# Altium PCB DAL_DPU.PcbDoc (part 1 of 3)
Units mm, origin at the board's own origin, x right, y up, seen from the top; angles counter-clockwise.
Board outline 93 x 90 mm, 4 copper layers (L1_TOP, L2_GND, L3_POWER, L4_BOT), stack 1.584 mm thick; 234 components, 146 nets, 788 pads, 889 vias.
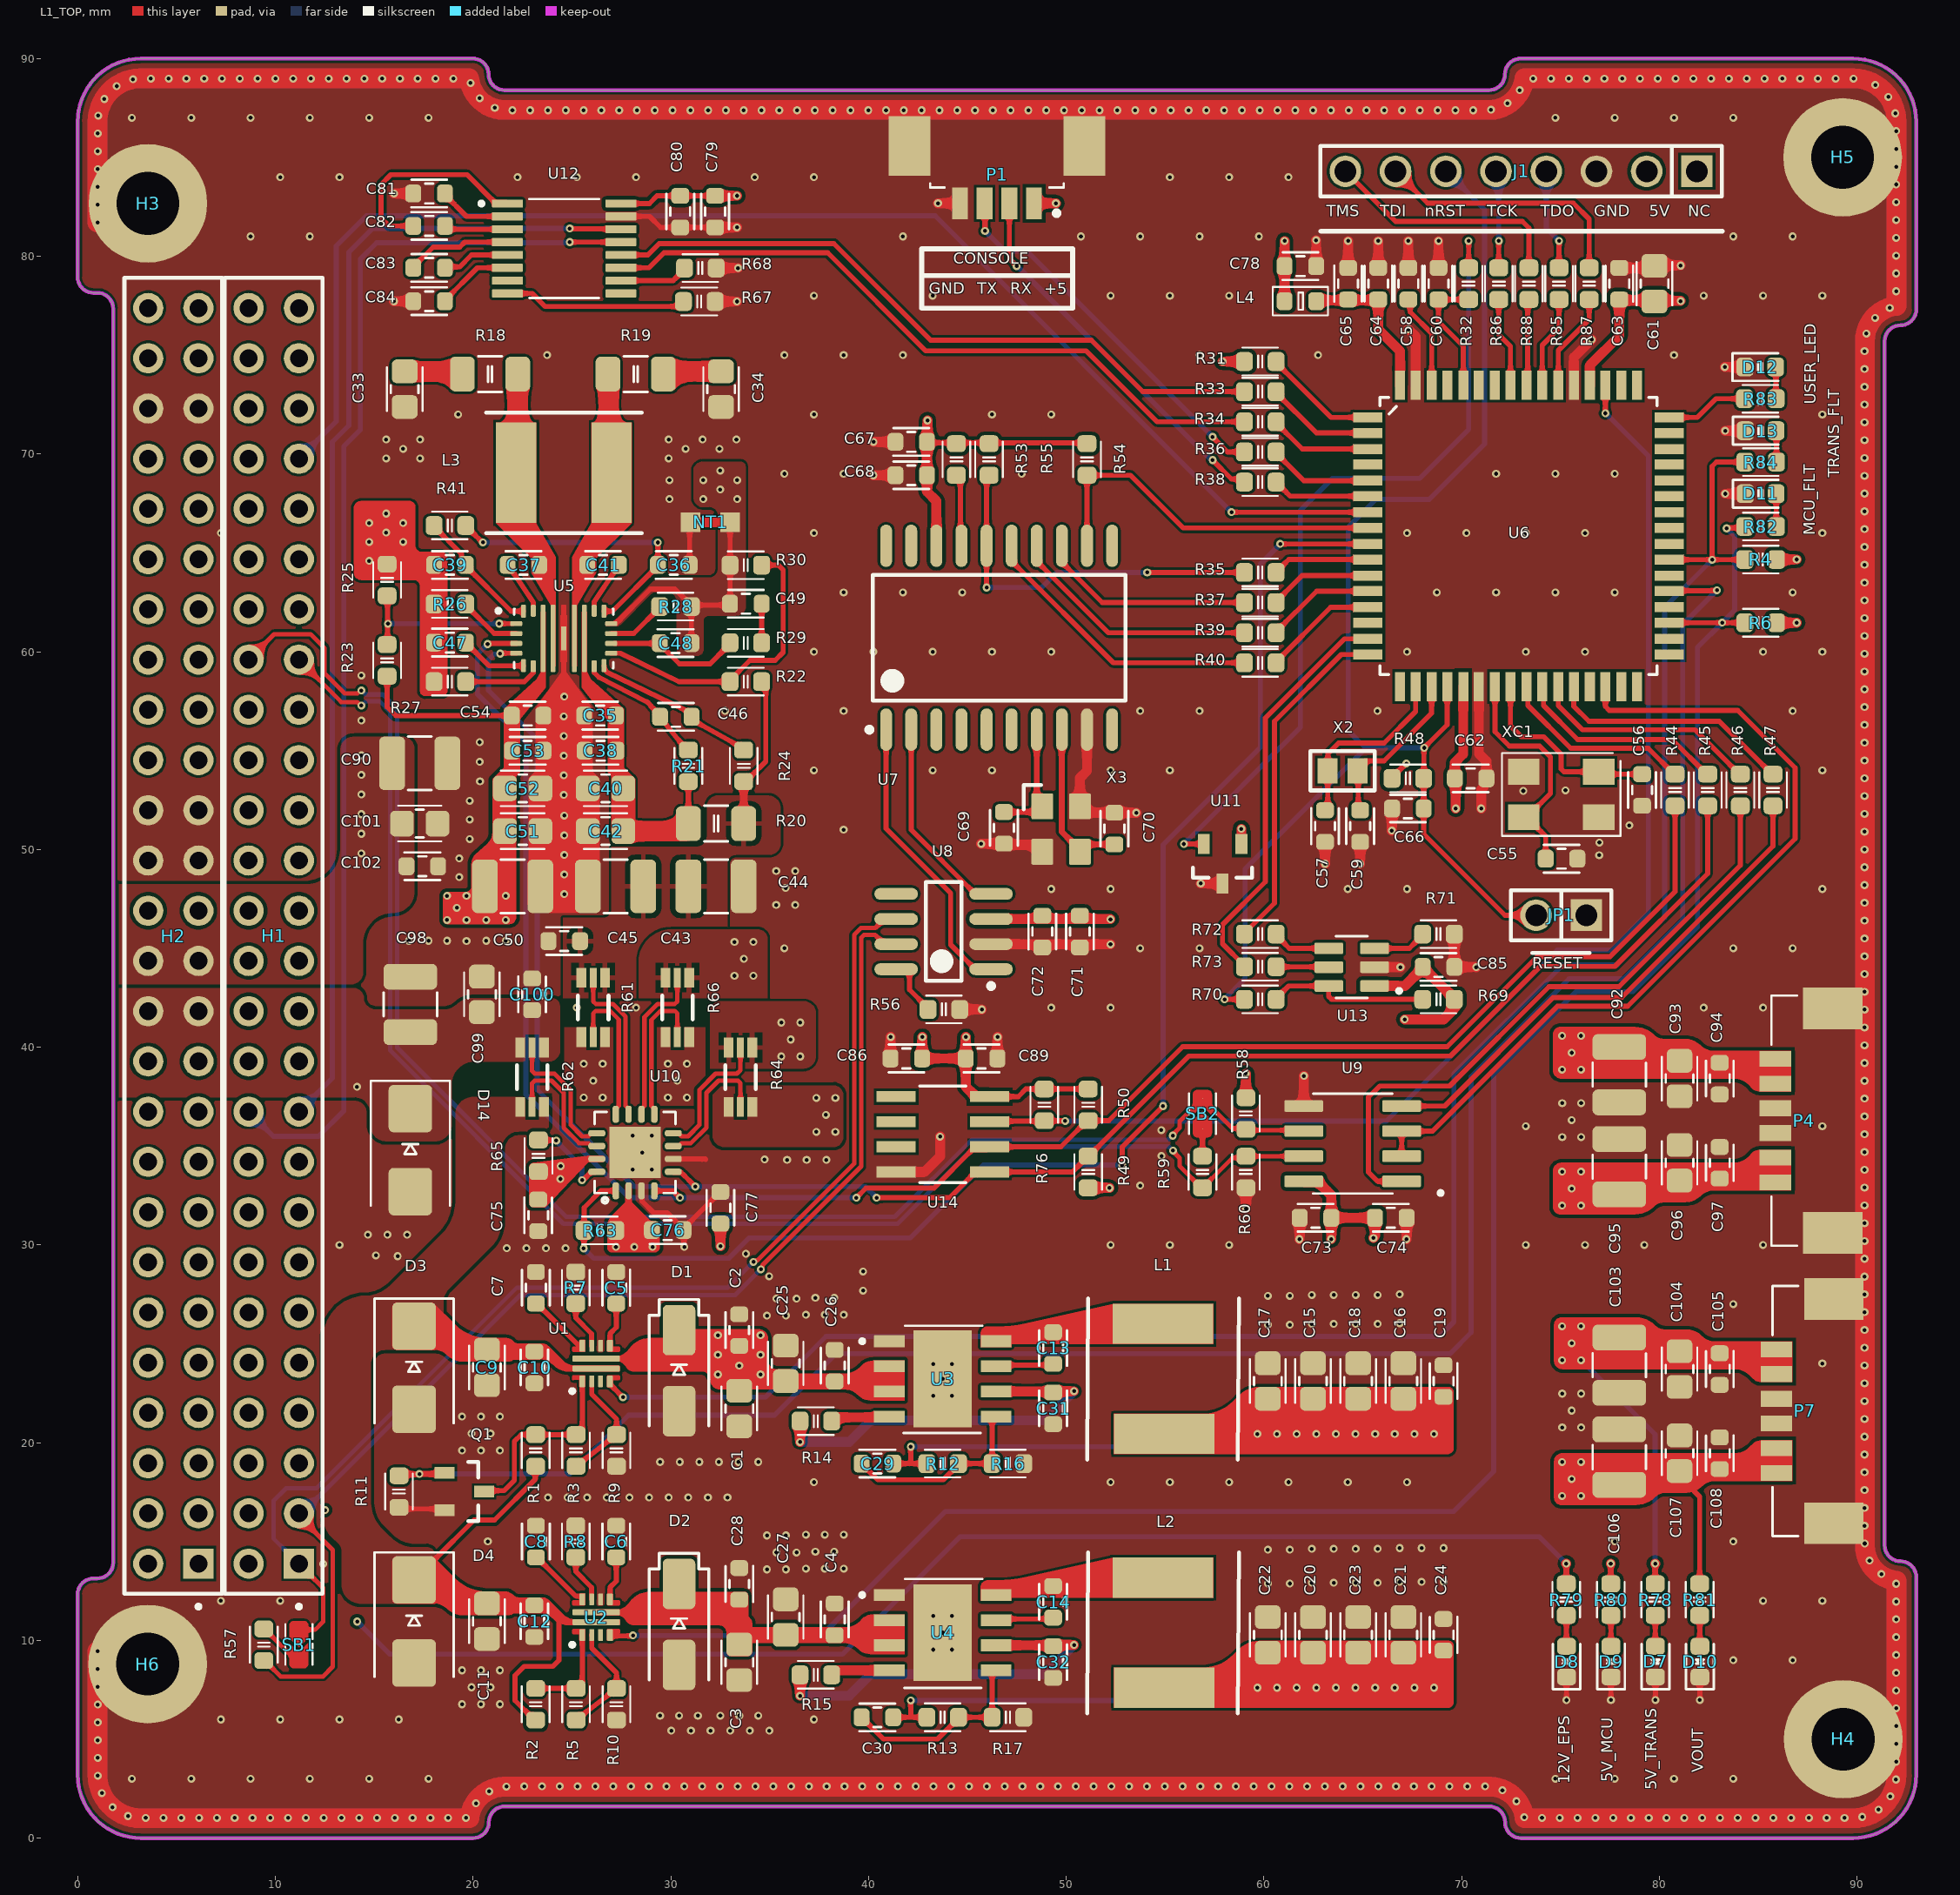
[diagram p0: L1_TOP view]
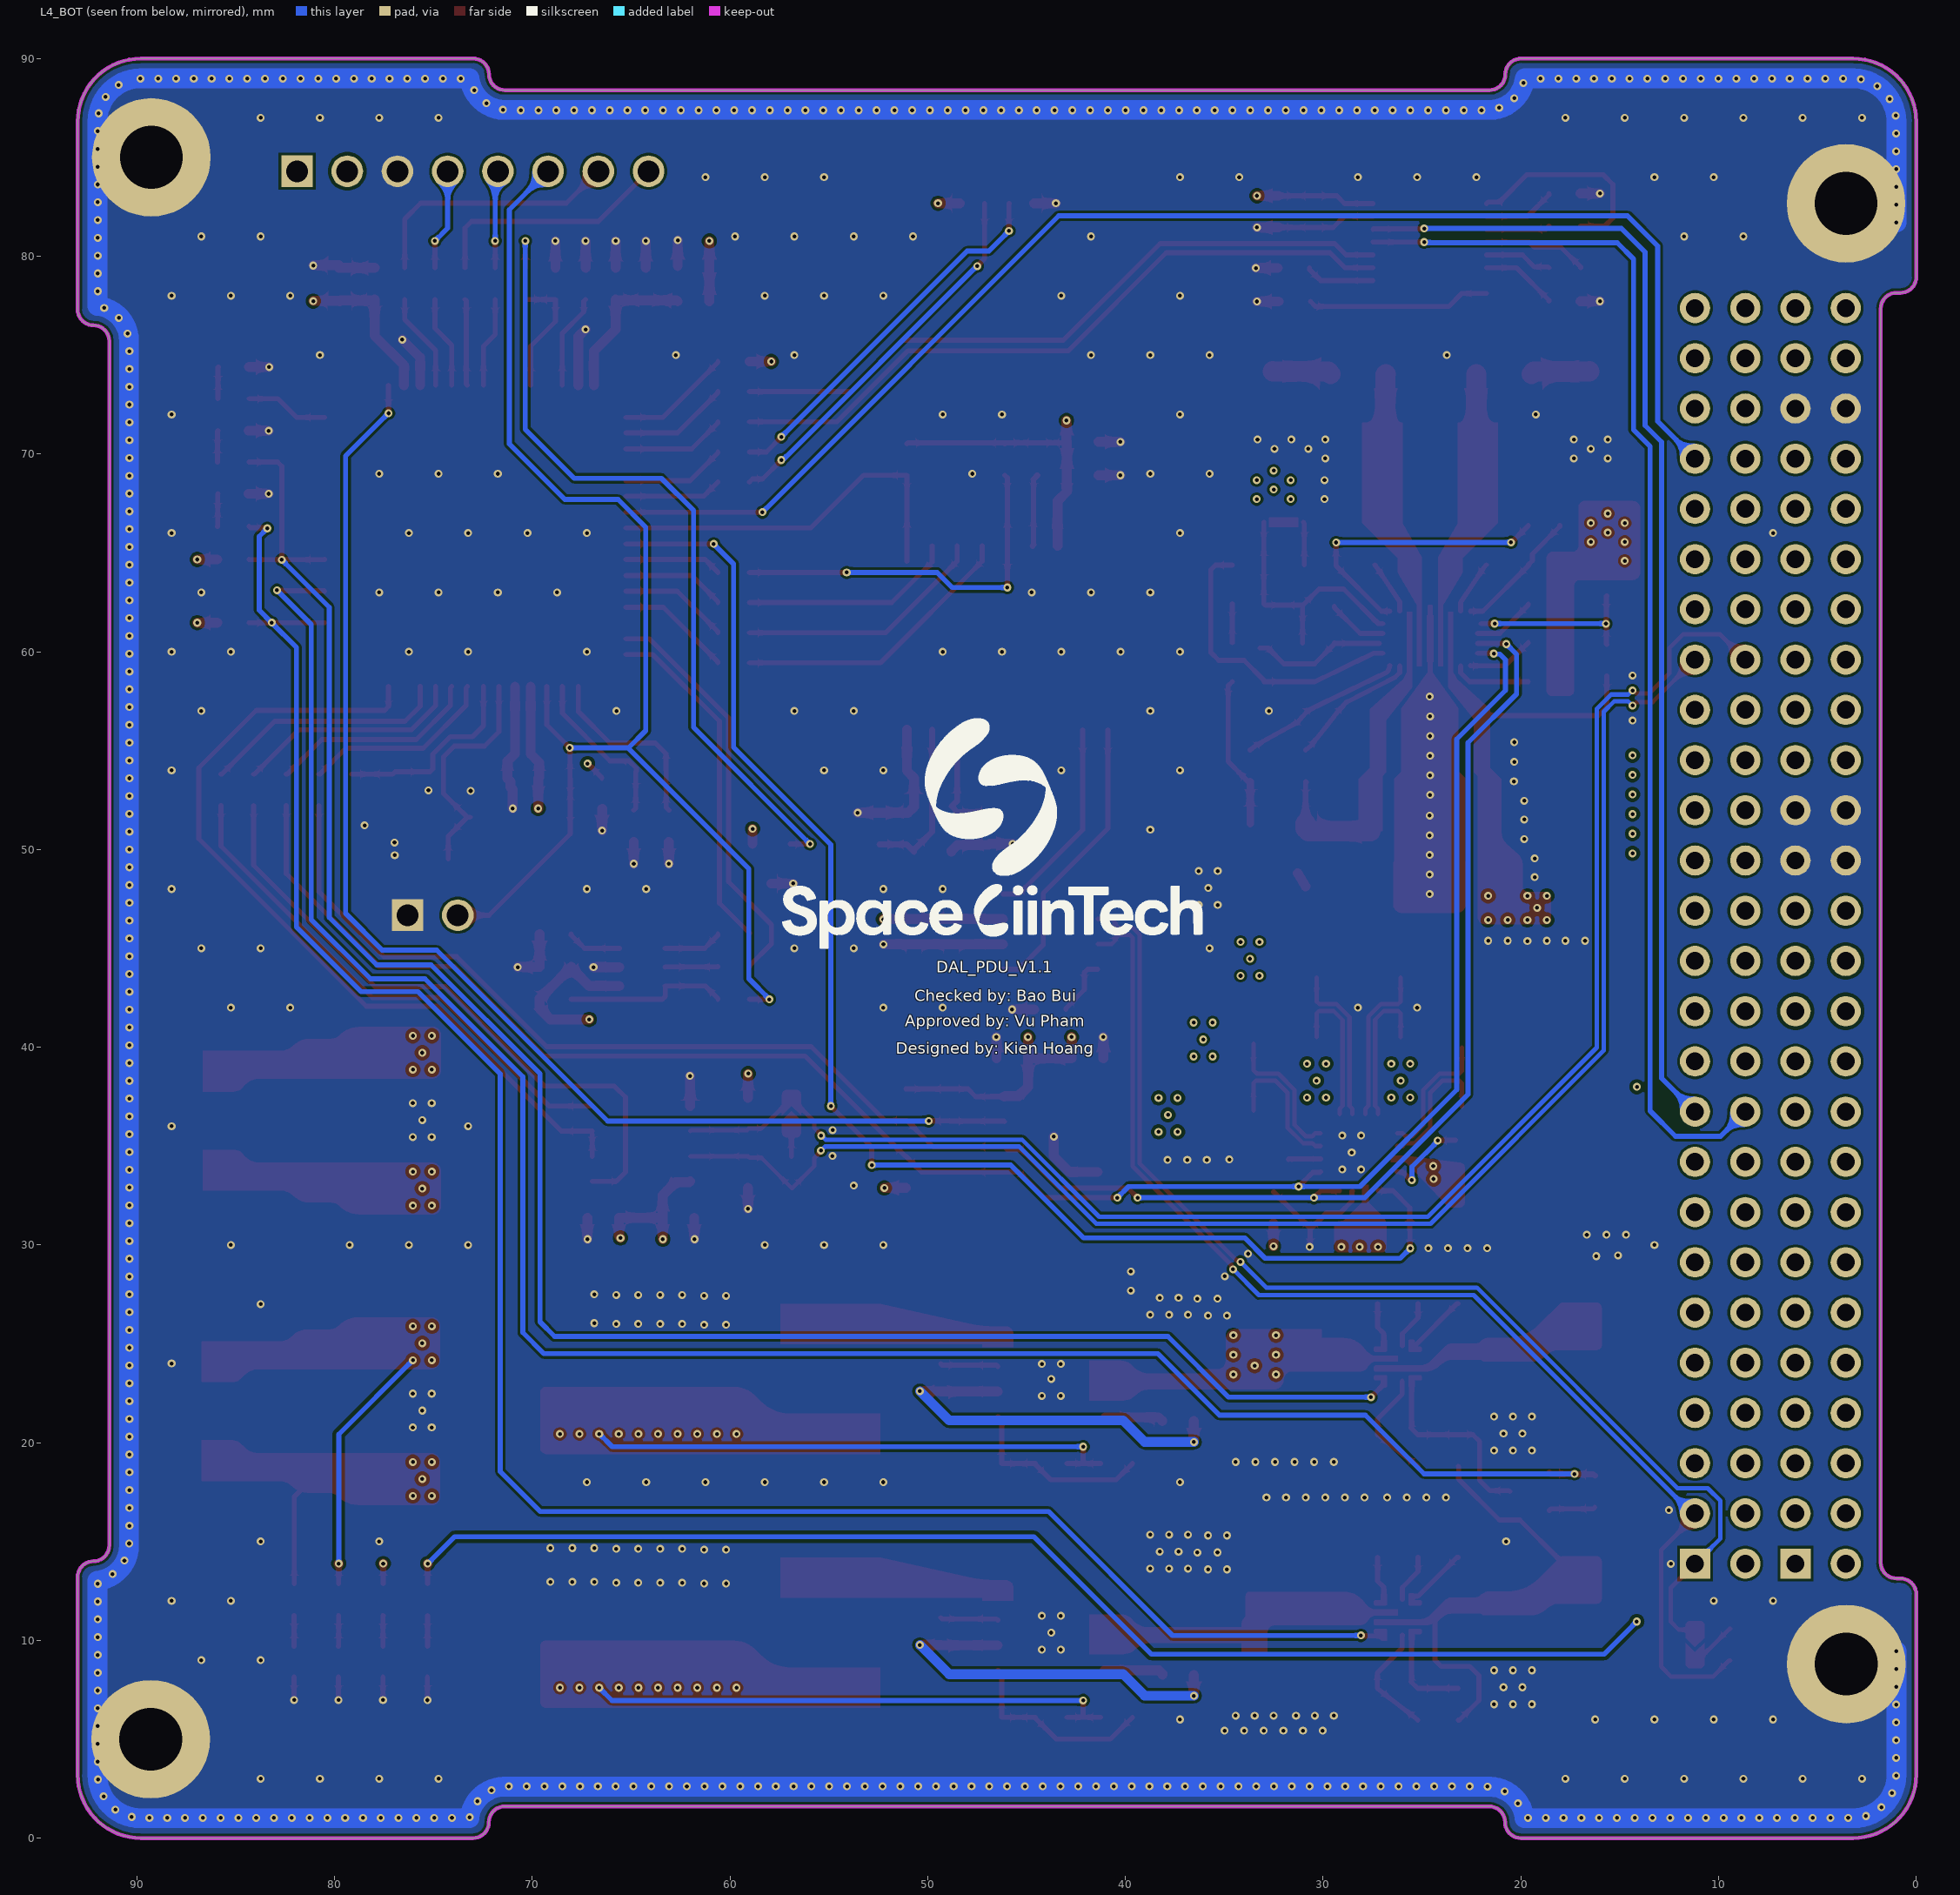
[diagram p1: L4_BOT view, seen from below]
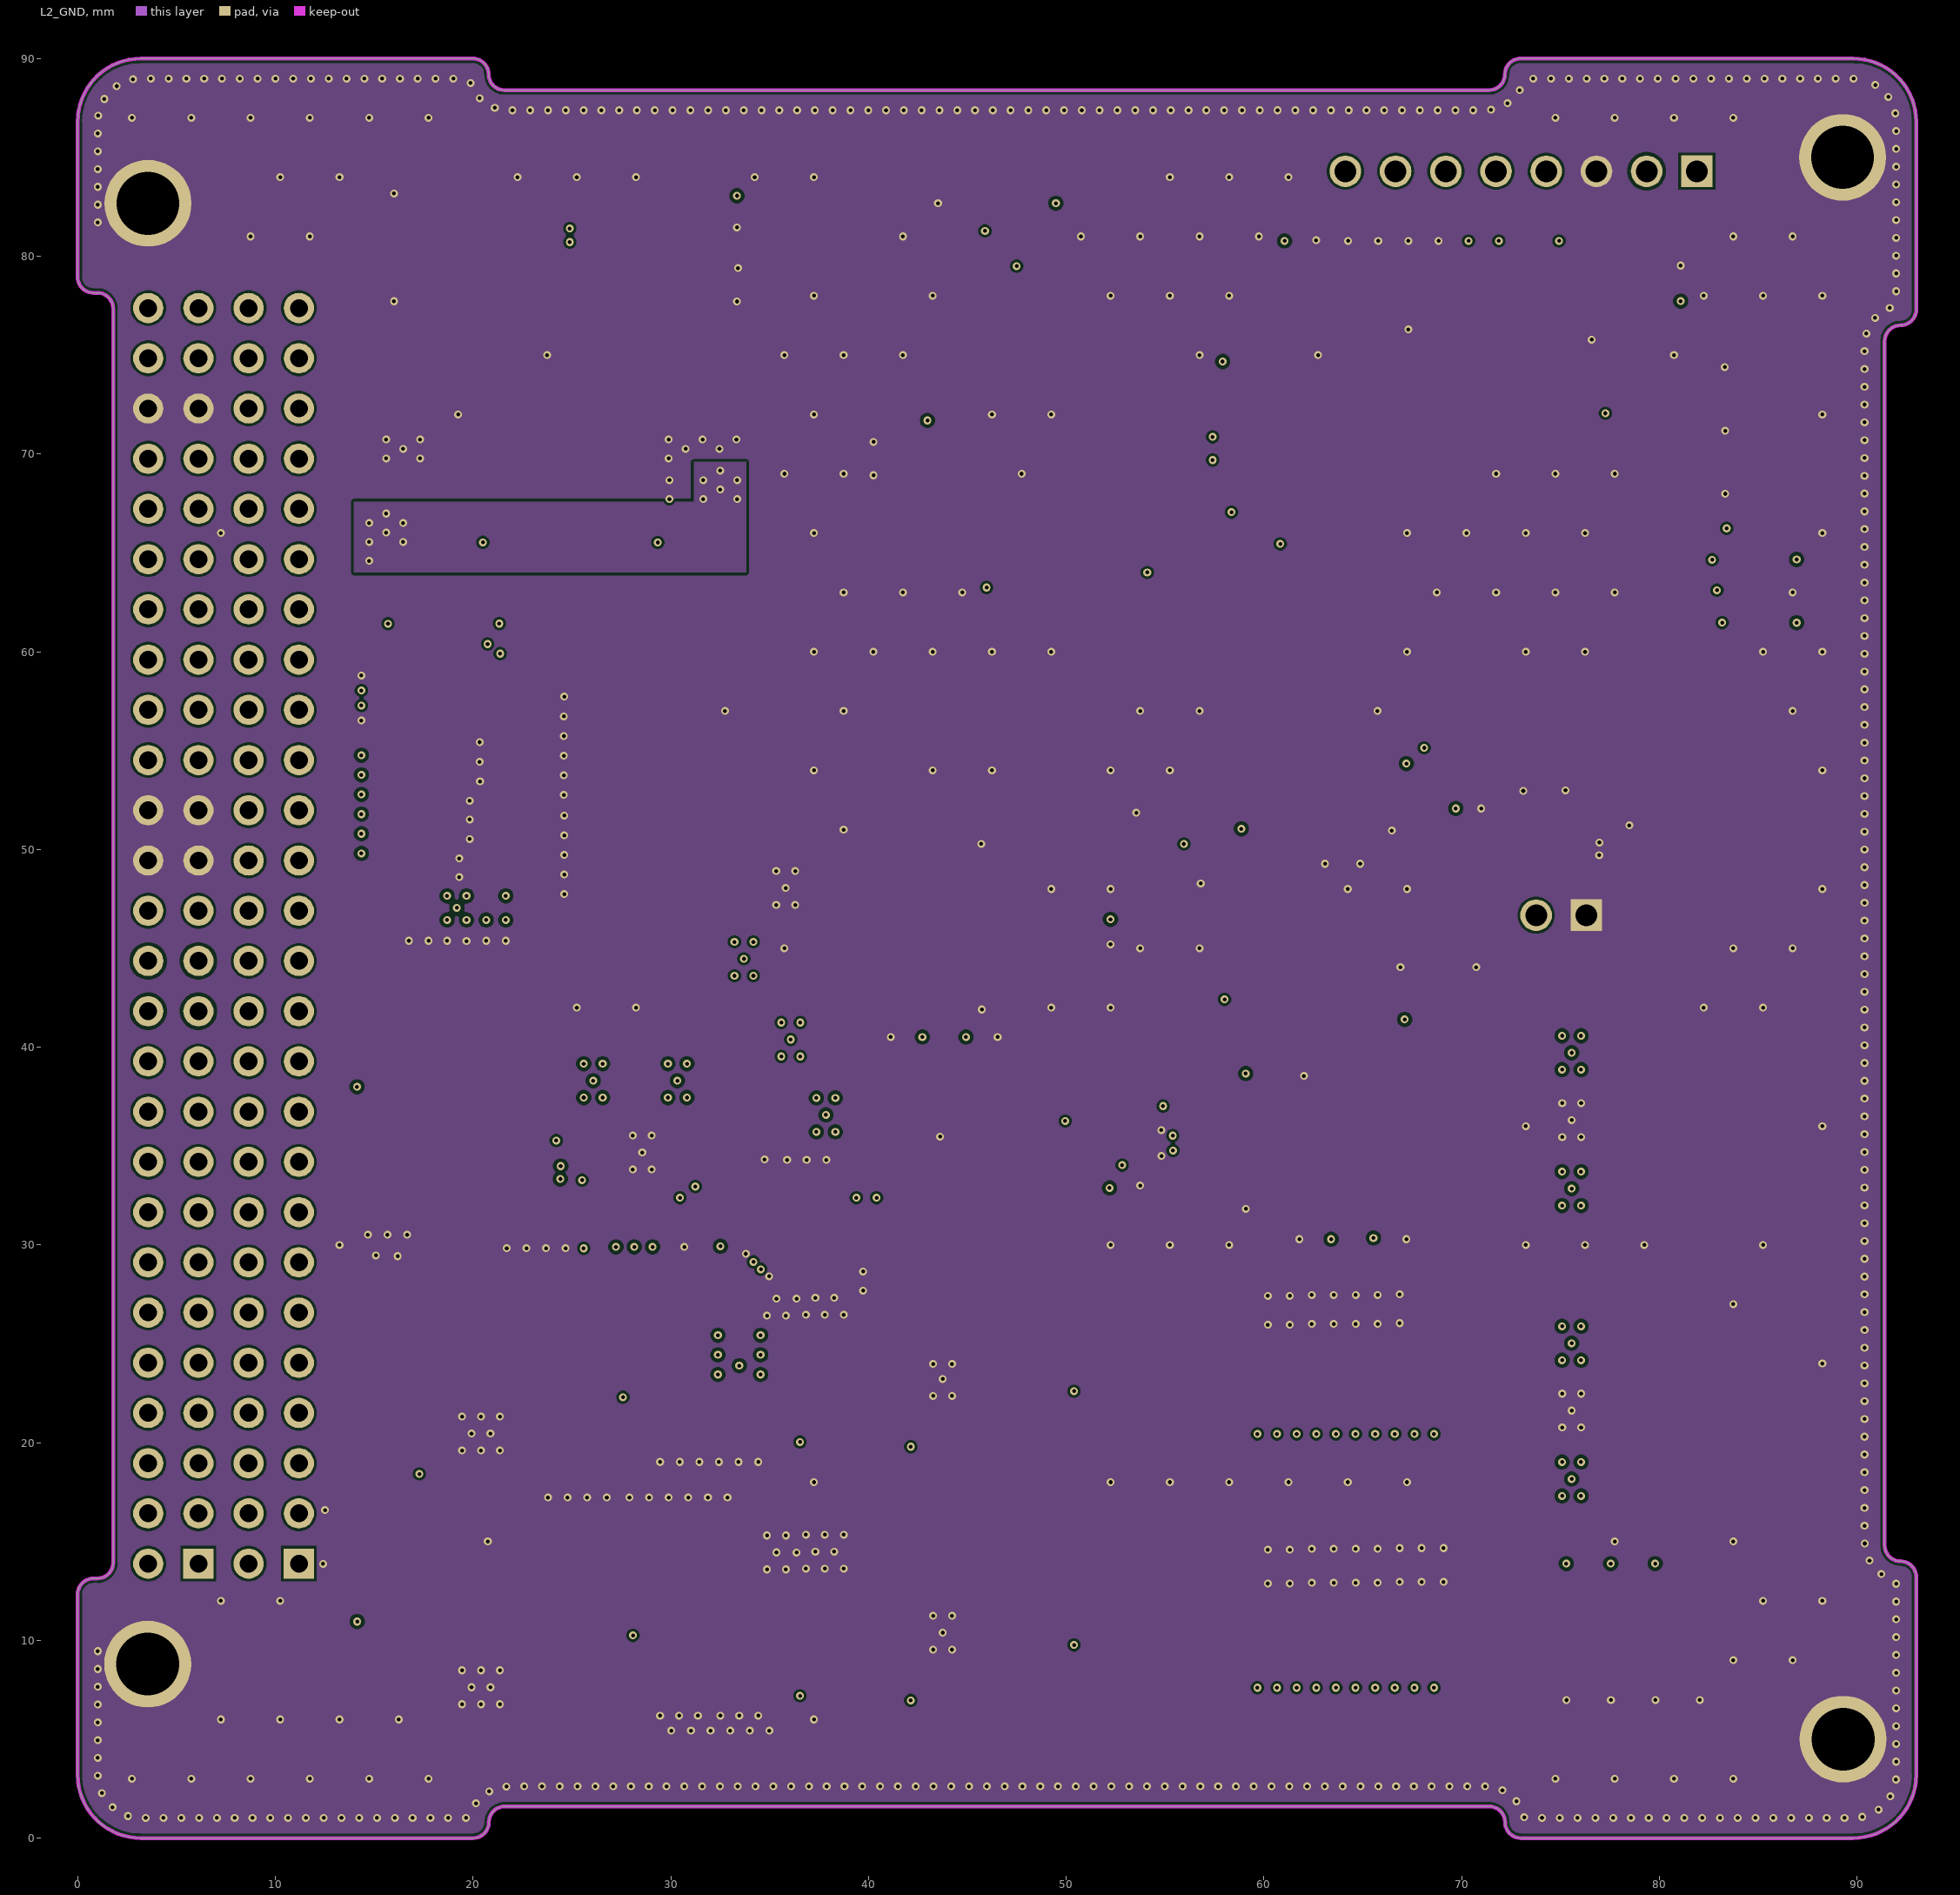
[diagram p2: L2_GND]
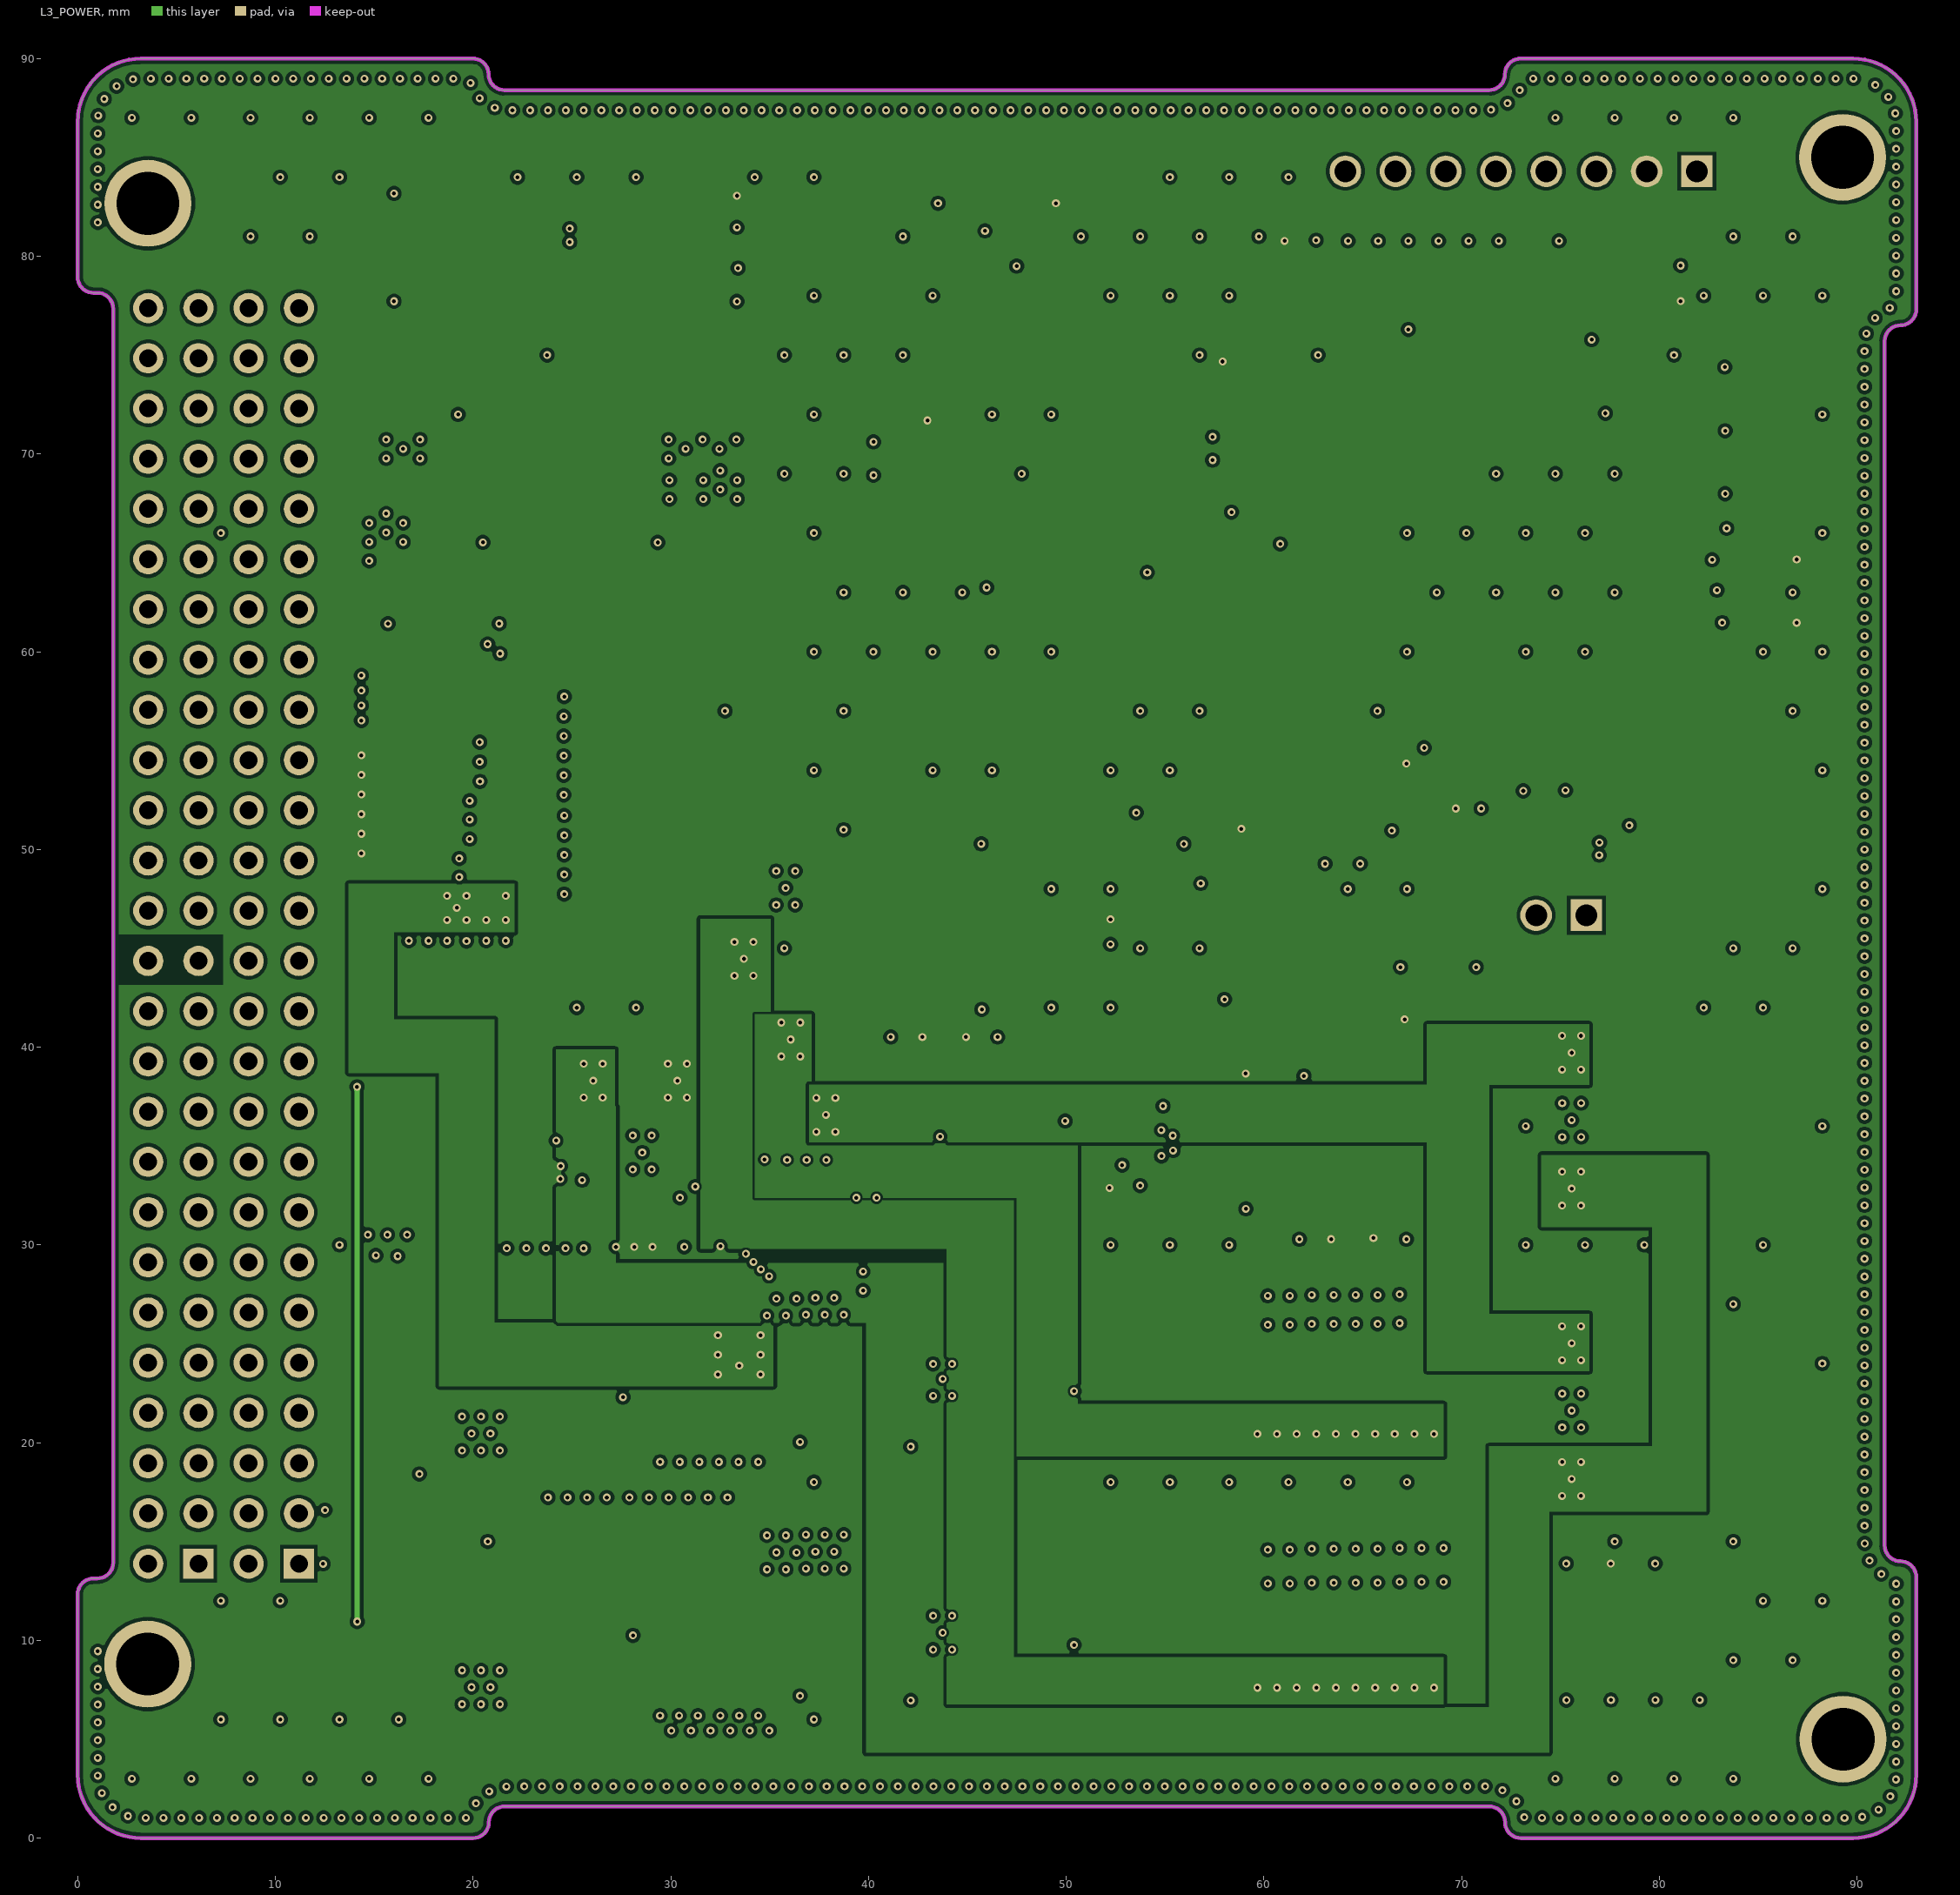
[diagram p3: L3_POWER]
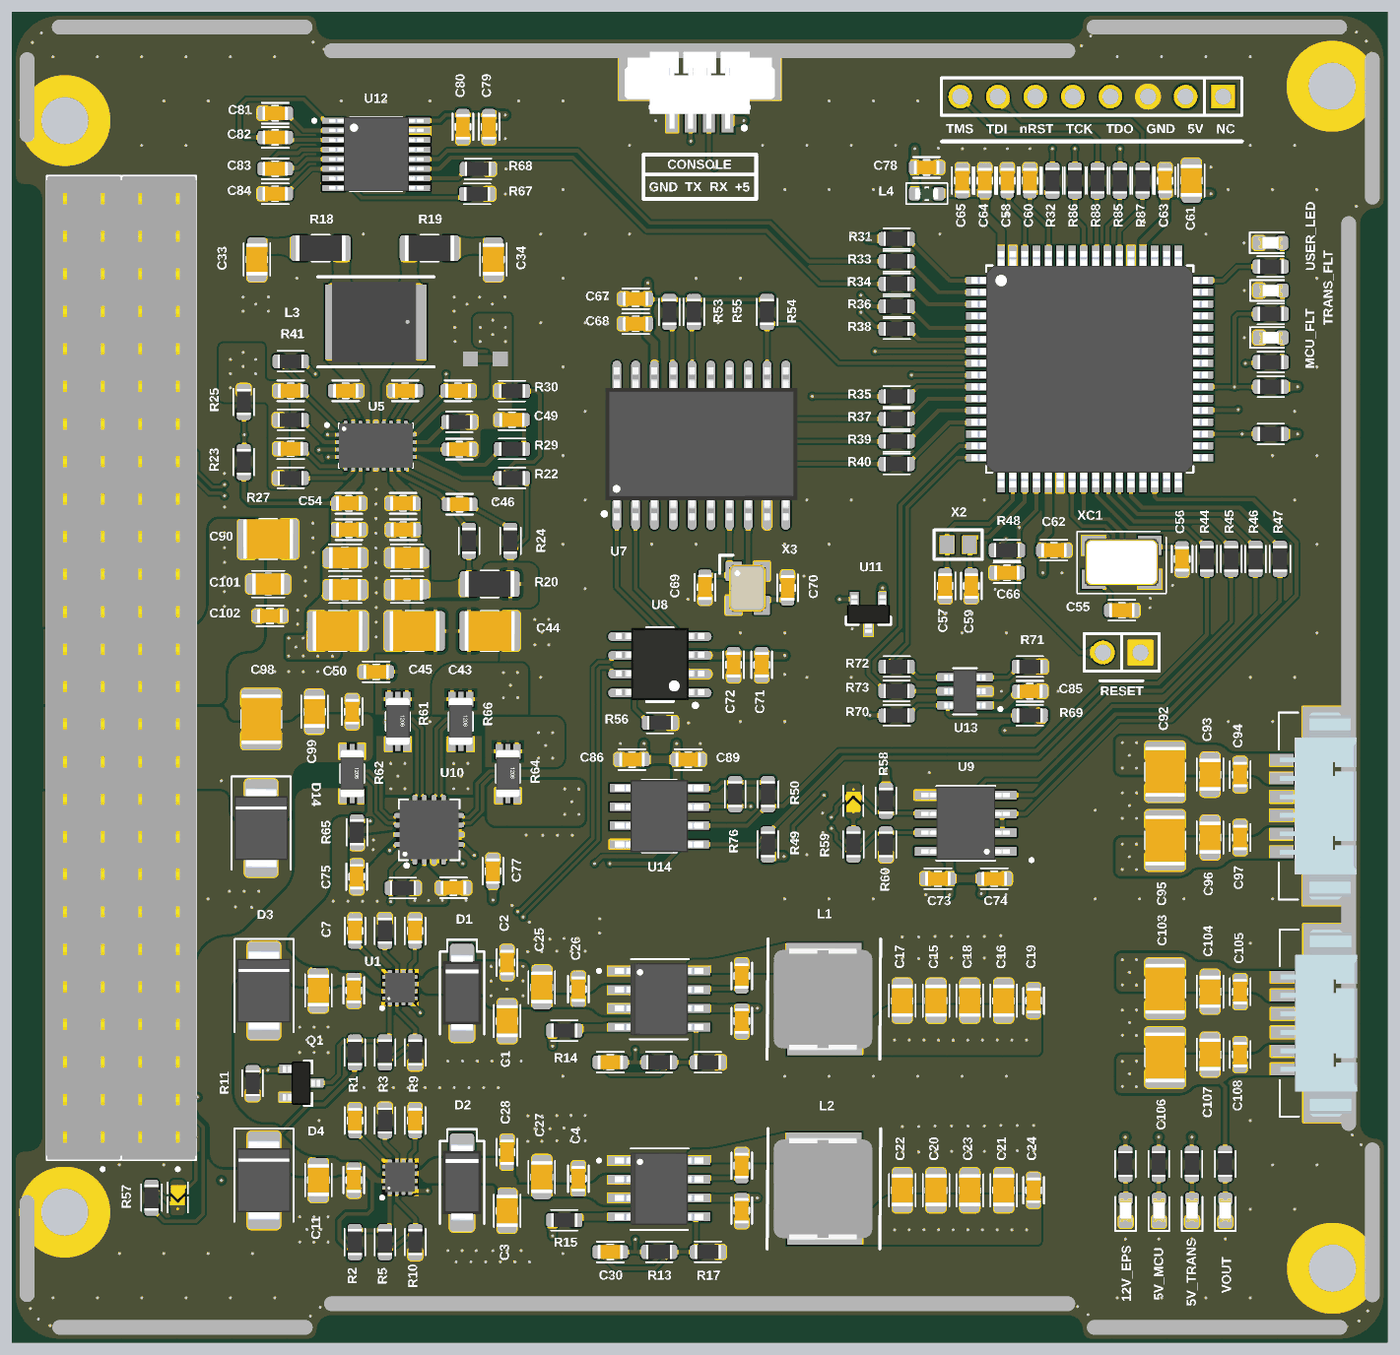
[diagram p6: 3D render of the assembled board from above, using the file's embedded part models]

## Layer stack, top to bottom
Top Solder: solder mask 0.012, Solder Resist, Dk 3.5
L1_TOP: signal copper 0.04
Dielectric 2: prepreg 0.2, PP-022, Dk 4.4
L2_GND: signal copper 0.032
Dielectric 1: core 1.04, FR-4, Dk 4.5
L3_POWER: signal copper 0.032
Dielectric 3: prepreg 0.2, PP-022, Dk 4.4
L4_BOT: signal copper 0.04
Bottom Solder: solder mask 0.012, Solder Resist, Dk 3.5

## Board outline
0,3.2 0,12.33 cw(c0.8,12.33) 0.8,13.13 1,13.13 ccw(c1,13.93) 1.8,13.93 1.8,77.35 ccw(c1,77.35) 1,78.15 0.8,78.15 cw(c0.8,78.95) 0,78.95 0,86.8 cw(c3.2,86.8) 3.193,90 19.989,90 cw(c19.989,89.2) 20.789,89.2 ccw(c21.589,89.2) 21.589,88.4 71.389,88.4 ccw(c71.389,89.2) 72.189,89.2 cw(c72.989,89.2) 72.989,90 89.807,90 cw(c89.8,86.8) 93,86.807 93,77.307 cw(c92.2,77.307) 92.2,76.507 ccw(c92.2,75.707) 91.4,75.707 91.4,14.8 ccw(c92.2,14.8) 92.2,14 cw(c92.2,13.2) 93,13.2 93,3.2 cw(c89.8,3.2) 89.8,0 73,0 cw(c73,0.8) 72.2,0.8 ccw(c71.4,0.8) 71.4,1.6 21.6,1.6 ccw(c21.6,0.8) 20.8,0.8 cw(c20,0.8) 20,0 3.2,0 cw(c3.2,3.2)

## Design rules (kind name [scope] priority, off if disabled: settings)
Clearance "Stitching PGND" [IsStitchingVia and InNet('PGND') vs (IsVia and (Not IsStitchingVia)) Or IsPad] p1: gap=3 ignorepadtopadclearanceinfootprint=FALSE
Clearance Clearance_IC_Footprints [InComponent('U1') OR InComponent('U2') OR InComponent('U5') OR InComponent('U10') vs InComponent('U1') OR InComponent('U2') OR InComponent('U5') OR InComponent('U10')] p2: gap=0.127 ignorepadtopadclearanceinfootprint=TRUE // Fix IC Internal Region to Pad Clearance
Clearance Clearance_Power [InNet('+12') OR InNet('+12V') OR InNet('+12_TRANS') OR InNet('+12_MCU') OR InNet('+12_EPS') OR InNet('+5') OR InNet('+5V') OR InNet('+5_TRANS') OR InNet('VOUT')] p3: gap=0.175 ignorepadtopadclearanceinfootprint=TRUE // Auto Power Clearance
Clearance Clearance_Default [All] p4: gap=0.127 ignorepadtopadclearanceinfootprint=TRUE except(0.1: Arc-SMDPad Track-SMDPad SMDPad-SMDPad) // General Clearance
ComponentClearance ComponentClearance_1 [InComponent('H2') AND InComponent('H1')] p1: gap=0 collisioncheckmode=3 verticalgap=0 showdistances=FALSE
ComponentOrientations [All] p1: allowedrotations=1
DiffPairsRouting [InDifferentialPairClass('All Differential Pairs')] p1: maxlimit=0.254 minlimit=0.127 mostfreqgap=0.178 toplayer_maxgap=0.127 toplayer_prefgap=0.127 toplayer_minwidth=0.224 toplayer_maxwidth=0.224 toplayer_prefwidth=0.224 bottomlayer_maxgap=0.127 bottomlayer_prefgap=0.127 bottomlayer_minwidth=0.224 bottomlayer_maxwidth=0.224 bottomlayer_prefwidth=0.224 impedanceprofiledriven=TRUE impedanceprofileid={B17CEEBF-25AE-407B-A35C-83B25E6B4BB8} impedanceprofilevalue=90.000000 maxuncoupledlength=12.7 // Auto DiffPair Routing
HoleSize [All] p1: absolutevalues=TRUE maxlimit=6.35 minlimit=0.2 maxpercent=80.000 minpercent=20.000 // Supports Min Drill 0.2mm
HoleToHoleClearance [All] p1: gap=0.2 allowstackedmicrovias=TRUE // Fixed Hole Clear Bug
MinimumSolderMaskSliver [All] p1: minsoldermaskwidth=0.1 // Fixed Mask Sliver
NetAntennae NetAntennae_IgnorePowerGND [NOT (InNet('PGND') OR InNet('AGND') OR InNet('+12') OR InNet('+12V') OR InNet('+12_TRANS') OR InNet('+12_MCU') OR InNet('+12_EPS') OR InNet('+5') OR InNet('+5V') OR InNet('+5_TRANS') OR InNet('VOUT') OR InNet('POWER'))] p2: netantennaetolerance=2.54 // Ignore Antennae Check on Power and GND Nets
PlaneClearance [All] p1: clearance=0.381
PlaneConnect [All] p1: planeconnectstyle=Direct reliefexpansion=0.508 reliefentries=4 reliefconductorwidth=0.254 reliefairgap=0.254
PolygonConnect [IsVia] p1: connectstyle=Direct reliefconductorwidth=0.254 reliefentries=4 polygonreliefangle="90 Angle" airgapwidth=0.254
PolygonConnect PolygonConnect_PowerDirect [InNet('PGND') OR InNet('AGND') OR InNet('+12') OR InNet('+12V') OR InNet('+12_TRANS') OR InNet('+12_MCU') OR InNet('+12_EPS') OR InNet('+5') OR InNet('+5V') OR InNet('+5_TRANS') OR InNet('VOUT')] p2: connectstyle=Direct reliefconductorwidth=0.254 reliefentries=4 polygonreliefangle="90 Angle" airgapwidth=0.254 // Auto Direct Connect for Power/GND
PolygonConnect PolygonConnect_SignalRelief [All] p3: connectstyle=Relief reliefconductorwidth=0.254 reliefentries=4 polygonreliefangle="90 Angle" airgapwidth=0.254 // Relief Connect for Signals
RoutingVias [All] p1: holewidth=0.2 width=0.4 viastyle="Through Hole" minholewidth=0.2 minwidth=0.4 maxholewidth=0.3 maxwidth=0.6 // Supports Vias 0.2mm/0.3mm/0.4mm Drill
SilkToSilkClearance [All] p1: silktosilkclearance=0.1
SilkToSolderMaskClearance [IsPad] p1: minsilkscreentomaskgap=0.1 clearancetoexposedcopper=TRUE // Fixed Silk Gap
SolderMaskExpansion SolderMaskExpansion_ViaTenting [IsVia] p1: expansion=0 istentingtop=TRUE useseparateexpansions=TRUE expansionbottom=0 istentingbottom=TRUE // Tenting All Vias
SolderMaskExpansion SolderMaskExpansion_Default [All] p2: expansion=0.076 istentingtop=FALSE // Pad Solder Mask Expansion
SupplyNets "Schematic Supply Nets_12" [InNet('+12_MCU')] p1: voltage=0.000
SupplyNets "Schematic Supply Nets_11" [InNet('+5_TRANS')] p2: voltage=0.000
SupplyNets "Schematic Supply Nets_10" [InNet('PGND')] p3: voltage=0.000
SupplyNets "Schematic Supply Nets_9" [InNet('+12_TRANS')] p4: voltage=0.000
SupplyNets "Schematic Supply Nets_8" [InNet('AVCC')] p5: voltage=0.000
SupplyNets "Schematic Supply Nets_7" [InNet('AGND')] p6: voltage=0.000
SupplyNets "Schematic Supply Nets_6" [InNet('+5_SENSE')] p7: voltage=0.000
SupplyNets "Schematic Supply Nets_5" [InNet('+12')] p8: voltage=0.000
SupplyNets "Schematic Supply Nets_4" [InNet('VOUT')] p9: voltage=0.000
SupplyNets "Schematic Supply Nets_3" [InNet('+5')] p10: voltage=0.000
SupplyNets "Schematic Supply Nets_2" [InNet('+12_EPS')] p11: voltage=0.000
SupplyNets "Schematic Supply Nets_1" [InNet('VOUT_SENSE')] p12: voltage=0.000
SupplyNets "Schematic Supply Nets" [InNet('+5_SENSE_TRANS')] p13: voltage=0.000
Width Width_Power [InNet('+12') OR InNet('+12V') OR InNet('+12_TRANS') OR InNet('+12_MCU') OR InNet('+12_EPS') OR InNet('+5') OR InNet('+5V') OR InNet('+5_TRANS') OR InNet('+5_SENSE') OR InNet('+5_SENSE_TRANS') OR InNet('VOUT') OR InNet('VOUT_SENSE') OR InNet('AVCC') OR InNet('GND') OR InNet('PGND')] p1: maxlimit=1.5 minlimit=0.254 preferedwidth=0.5 // Auto Power Width 1A Max
Width Width_Signal [All] p2: maxlimit=1.016 minlimit=0.127 preferedwidth=0.254 // Signal Width
21 further rules are at their usual default settings.

## Classes and differential pairs
net class SENSE_CURRENT: SENSE1_N SENSE1_P SENSE2_N SENSE2_P SENSE3_N SENSE3_P SENSE4_N SENSE4_P
component class I2C: C86 C89 R76 U14
component class WatchDog: C85 R69 R70 R71 R72 R73 U13
component class RS232: C79 C80 C81 C82 C83 C84 R67 R68 U12
component class LED: D7 D8 D9 D10 D11 D12 D13 R78 R79 R80 R81 R82 R83 R84
component class "Mounting Holes": H3 H4 H5 H6
component class TemperatureSensor: C78 U11
component class RS485: C73 C74 R58 R59 R60 SB2 U9
component class PowerMonitor: C75 C76 C77 R61 R62 R63 R64 R65 R66 U10
component class MCU: C55 C56 C57 C58 C59 C60 C61 C62 C63 C64 C65 C66 JP1 L4 R31 R32 R33 R34 R35 R36 R37 R38 R39 R40 R44 R45 R46 R47 R48 R49 R50 U6 X2 XC1
component class eFuse: C1 C2 C3 C4 C5 C6 C7 C8 C9 C10 C11 C12 D1 D2 D3 D4 Q1 R1 R2 R3 R4 R5 R6 R7 R8 R9 R10 R11 U1 U2
component class Connectors: C90 C92 C93 C94 C95 C96 C97 C98 C99 C100 C101 C102 C103 C104 C105 C106 C107 C108 D14 H1 H2 J1 P1 P4 P7 R85 R86 R87 R88 RS-485
component class CAN: C67 C68 C69 C70 C71 C72 R53 R54 R55 R56 R57 SB1 U7 U8 X3
component class "Buck 5-12V": C33 C34 C35 C36 C37 C38 C39 C40 C41 C42 C43 C44 C45 C46 C47 C48 C49 C50 C51 C52 C53 C54 L3 NT1 R18 R19 R20 R21 R22 R23 R24 R25 R26 R27 R28 R29 R30 R41 U5
component class "Buck 5V": C13 C14 C15 C16 C17 C18 C19 C20 C21 C22 C23 C24 C25 C26 C27 C28 C29 C30 C31 C32 L1 L2 R12 R13 R14 R15 R16 R17 TPS5430DDAR U3 U4 x
differential pair PC104_RS485: +PC104_RS485_A -PC104_RS485_B
differential pair SENSE4: +SENSE4_P -SENSE4_N
differential pair SENSE3: +SENSE3_P -SENSE3_N
differential pair SENSE2: +SENSE2_P -SENSE2_N
differential pair SENSE1: +SENSE1_P -SENSE1_N
differential pair CAN: +CAN_H -CAN_L

## Components (designator, comment, footprint, x,y, rotation, side; value= is the part's Value field where it differs from the comment)
C1 "22uF" CAP_C_2012X110 33.466,21.724 r90 top
C2 "0.1uF" CAP_C_1608X80 33.466,25.69 r90 top
C3 "22uF" CAP_C_2012X110 33.466,8.89 r90 top
C4 "0.1uF" CAP_C_1608X80 38.292,11.06 r90 top
C5 "1nF" CAP_C_1608X80 27.243,27.831 r90 top
C6 "1nF" CAP_C_1608X80 27.243,14.997 r90 top
C7 "4.7nF" CAP_C_1608X80 23.179,27.831 r90 top
C8 "4.7nF" CAP_C_1608X80 23.179,14.997 r90 top
C9 "22uF" CAP_C_2012X110 20.701,23.803 r90 top
C10 "0.1uF" CAP_C_1608X80 23.101,23.803 r90 top
C11 "22uF" CAP_C_2012X110 20.701,10.969 r90 top
C12 "0.1uF" CAP_C_1608X80 23.101,10.969 r90 top
C13 "0.1uF" CAP_C_1608X80 49.341,24.783 r270 top
C14 "0.1uF" CAP_C_1608X80 49.341,11.949 r270 top
C15 "22uF" CAP_C_2012X110 62.484,23.114 r90 top
C16 "22uF" CAP_C_2012X110 67.056,23.114 r90 top
C17 "22uF" CAP_C_2012X110 60.198,23.114 r90 top
C18 "22uF" CAP_C_2012X110 64.77,23.114 r90 top
C19 "0.1uF" CAP_C_1608X80 69.088,23.114 r90 top
C20 "22uF" CAP_C_2012X110 62.484,10.28 r90 top
C21 "22uF" CAP_C_2012X110 67.056,10.28 r90 top
C22 "22uF" CAP_C_2012X110 60.198,10.28 r90 top
C23 "22uF" CAP_C_2012X110 64.77,10.28 r90 top
C24 "0.1uF" CAP_C_1608X80 69.088,10.28 r90 top
C25 "10uF" CAP_C_2012X110 35.814,24.01 r90 top
C26 "0.1uF" CAP_C_1608X80 38.292,23.894 r90 top
C27 "10uF" CAP_C_2012X110 35.814,11.176 r90 top
C28 "0.1uF" CAP_C_1608X80 33.466,12.856 r90 top
C29 "DNP/100nF" CAP_C_1608X80 40.451,18.941 r180 top
C30 "DNP/100nF" CAP_C_1608X80 40.451,6.107 r180 top
C31 "1uF" CAP_C_1608X80 49.341,21.735 r270 top
C32 "1uF" CAP_C_1608X80 49.341,8.901 r270 top
C33 "DNP/100nF" CAP_C_2012X110 16.542,73.279 r270 top
C34 "DNP/100nF" CAP_C_2012X110 32.544,73.279 r270 top
C35 "0.1uF" CAP_C_1608X80 26.425,56.769 r0 top
C36 "4.7uF" CAP_C_1608X80 30.152,64.389 r180 top
C37 "0.1uF" CAP_C_1608X80 22.552,64.389 r180 top
C38 "1uF" CAP_C_1608X80 26.448,54.991 r0 top
C39 "0.1uF" CAP_C_1608X80 18.828,64.389 r0 top
C40 "22uF" CAP_C_2012X110 26.702,53.086 r0 top
C41 "0.1uF" CAP_C_1608X80 26.575,64.389 r0 top
C42 "22uF" CAP_C_2012X110 26.702,50.927 r0 top
C43 "47uF" CAP_C_3225X80 27.21,48.133 r0 top
C44 "47uF" CAP_C_3225X80 32.29,48.133 r180 top
C45 "1uF" CAP_C_1608X80 24.613,45.364 r0 top
C46 "0.1uF" CAP_C_1608X80 30.258,56.707 r0 top
C47 "0.1uF" CAP_C_1608X80 18.828,60.461 r0 top
C48 "100pF" CAP_C_1608X80 30.242,60.436 r180 top
C49 "4.7nF" CAP_C_1608X80 33.798,62.425 r0 top
C50 "47uF" CAP_C_3225X80 22.003,48.133 r180 top
C51 "22uF" CAP_C_2012X110 22.511,50.927 r180 top
C52 "22uF" CAP_C_2012X110 22.511,53.086 r180 top
C53 "1uF" CAP_C_1608X80 22.765,54.991 r180 top
C54 "0.1uF" CAP_C_1608X80 22.759,56.769 r180 top
C55 "12pF" CAP_C_1608X80 75.057,49.53 r180 top
C56 "12pF" CAP_C_1608X80 79.13,53.008 r90 top
C57 "12pF" CAP_C_1608X80 63.094,51.181 r90 top
C58 "0.1uF" CAP_C_1608X80 67.31,78.613 r90 top
C59 "12pF" CAP_C_1608X80 64.872,51.181 r90 top
C60 "0.1uF" CAP_C_1608X80 68.834,78.613 r90 top
C61 "10uF" CAP_C_2012X110 79.756,78.613 r270 top
C62 "0.1uF" CAP_C_1608X80 70.46,53.594 r0 top
C63 "0.1uF" CAP_C_1608X80 77.978,78.613 r90 top
C64 "0.1uF" CAP_C_1608X80 65.786,78.613 r90 top
C65 "1uF" CAP_C_1608X80 64.262,78.613 r90 top
C66 "0.1uF" CAP_C_1608X80 67.285,52.07 r0 top
C67 "1uF" CAP_C_1608X80 42.164,70.612 r180 top
C68 "0.1uF" CAP_C_1608X80 42.164,68.923 r180 top
C69 "22pF" CAP_C_1608X80 46.853,51.092 r270 top
C70 "22pF" CAP_C_1608X80 52.441,51.054 r90 top
C71 "1uF" CAP_C_1608X80 50.692,45.847 r90 top
C72 "0.1uF" CAP_C_1608X80 48.792,45.847 r270 top
C73 "1uF" CAP_C_1608X80 62.611,31.369 r0 top
C74 "0.1uF" CAP_C_1608X80 66.421,31.369 r180 top
C75 "0.1uF" CAP_C_1608X80 23.297,31.496 r90 top
C76 "0.1uF" CAP_C_1608X80 29.845,30.747 r180 top
C77 "1uF" CAP_C_1608X80 32.512,31.877 r270 top
C78 "0.1uF" CAP_C_1608X80 61.849,79.502 r0 top
C79 "0.1uF" CAP_C_1608X80 32.243,82.258 r90 top
C80 "1uF" CAP_C_1608X80 30.48,82.258 r90 top
C81 "0.47uF" CAP_C_1608X80 17.78,83.174 r0 top
C82 "0.1uF" CAP_C_1608X80 17.78,81.534 r0 top
C83 "0.47uF" CAP_C_1608X80 17.78,79.416 r0 top
C84 "0.47uF" CAP_C_1608X80 17.78,77.724 r0 top
C85 "0.1uF" CAP_C_1608X80 68.834,44.057 r180 top
C86 "1uF" CAP_C_1608X80 41.915,39.429 r180 top
C89 "0.1uF" CAP_C_1608X80 45.72,39.429 r0 top
C90 "47uF" CAP_C_3225X80 17.304,54.356 r180 top
C92 "47uF" CAP_C_3225X80 77.978,38.608 r90 top
C93 "22uF" CAP_C_2012X110 81.026,38.411 r90 top
C94 "0.1uF" CAP_C_1608X80 83.058,38.411 r90 top
C95 "47uF" CAP_C_3225X80 77.978,33.956 r270 top
C96 "22uF" CAP_C_2012X110 81.026,34.153 r270 top
C97 "0.1uF" CAP_C_1608X80 83.058,34.153 r270 top
C98 "47uF" CAP_C_3225X80 16.83,42.164 r270 top
C99 "10uF" CAP_C_2012X110 20.447,42.672 r270 top
C100 "0.1uF" CAP_C_1608X80 22.987,42.672 r270 top
C101 "22uF" CAP_C_2012X110 17.304,51.308 r180 top
C102 "0.1uF" CAP_C_1608X80 17.431,49.149 r180 top
C103 "47uF" CAP_C_3225X80 77.978,23.917 r90 top
C104 "22uF" CAP_C_2012X110 81.026,23.72 r90 top
C105 "0.1uF" CAP_C_1608X80 83.058,23.72 r90 top
C106 "47uF" CAP_C_3225X80 77.978,19.265 r270 top
C107 "22uF" CAP_C_2012X110 81.026,19.462 r270 top
C108 "0.1uF" CAP_C_1608X80 83.058,19.462 r270 top
D1 "SS54" DO-214AC_SMA 30.418,23.64 r270 top
D2 "SS54" DO-214AC_SMA 30.418,10.806 r270 top
D3 "SMBJ16A" DO-214AA_SMB 17.018,23.785 r270 top value=1N5007
D4 "SMBJ16A" DO-214AA_SMB 17.018,10.951 r270 top value=1N5007
D7 "_LED_BLUE" LED_0603 79.807,8.921 r90 top
D8 "_LED_BLUE" LED_0603 75.311,8.921 r90 top
D9 "_LED_BLUE" LED_0603 77.559,8.921 r90 top
D10 "_LED_BLUE" LED_0603 82.055,8.921 r90 top
D11 "_LED_BLUE" LED_0603 85.128,67.99 r0 top
D12 "_LED_BLUE" LED_0603 85.108,74.398 r0 top
D13 "_LED_BLUE" LED_0603 85.128,71.176 r0 top
D14 "SMBJ16A" DO-214AA_SMB 16.83,34.794 r270 top value=1N5007
H1 "ESQ-126-14-G-D" ESQ-126-14-G-D 12.417,12.199 r90 top locked
H2 "ESQ-126-14-G-D" ESQ-126-14-G-D 7.337,12.199 r90 top locked
H3 "Shield" HEX-M3#1 3.595,82.46 r0 top
H4 "Shield" HEX-M3#2 87.757,4.318 r0 top
H5 "Shield" HEX-M3#3 89.3,85 r0 top
H6 "Shield" HEX-M3#3 3.57,8.8 r0 top
J1 "Header 8x1" Header_254P_8x1 73.013,84.298 r180 top
JP1 "Header 2x1" Header_254P_2x1 75.041,46.673 r180 top
L1 "8.2uH" "INDUCTOR 6363" 54.929,23.221 r180 top
L2 "8.2uH" "INDUCTOR 6363" 54.929,10.387 r180 top
L3 "4.7uH" "INDUCTOR SMD 6X5.7X5" 24.465,69.046 r0 top
L4 "FB 600R" L-SMD-0603 61.849,77.724 r0 top
NT1 "NT" NETTIE_SMD 32.004,66.548 r0 top net-tie
P1 "UART_CONSOLE" 0532610471 46.5,84.127 r180 top
P4 "532610671" 532610671 87.323,36.282 r90 top
P7 "532610671" 532610671 87.378,21.591 r90 top
Q1 "AO3400" SOT-23 19.558,17.526 r0 top
R1 "499k" RES_C_1608X60 23.166,19.603 r270 top
R2 "499k" RES_C_1608X60 23.166,6.769 r270 top
R3 "16.9k" RES_C_1608X60 25.211,19.603 r90 top
R4 "10k" RES_C_1608X60 85.128,64.663 r180 top
R5 "16.9k" RES_C_1608X60 25.211,6.769 r90 top
R6 "10k" RES_C_1608X60 85.128,61.462 r180 top
R7 "2.21k" RES_C_1608X60 25.198,27.831 r90 top
R8 "2.21k" RES_C_1608X60 25.198,14.997 r90 top
R9 "47.5k" RES_C_1608X60 27.255,19.603 r90 top
R10 "47.5k" RES_C_1608X60 27.255,6.769 r90 top
R11 "10k" RES_C_1608X60 16.256,17.526 r270 top
R12 "100k" RES_C_1608X60 43.753,18.941 r0 top
R13 "100k" RES_C_1608X60 43.753,6.107 r0 top
R14 "20k" RES_C_1608X60 37.338,21.089 r180 top
R15 "20k" RES_C_1608X60 37.338,8.255 r180 top
R16 "24.9k" RES_C_1608X60 47.055,18.941 r0 top
R17 "24.9k" RES_C_1608X60 47.055,6.107 r0 top
R18 "DNP/4.7k" RES_C_3216X70 20.86,74.041 r0 top
R19 "DNP/4.7k" RES_C_3216X70 28.226,74.041 r0 top
R20 "20mR" RES_C_3216X70 32.29,51.308 r180 top
R21 "10R" RES_C_1608X60 30.89,54.229 r90 top
R22 "102k" RES_C_1608X60 33.798,58.485 r0 top
R23 "332k" RES_C_1608X60 15.653,59.563 r270 top
R24 "10R" RES_C_1608X60 33.69,54.229 r90 top
R25 "43k" RES_C_1608X60 15.653,63.627 r90 top
R26 "10k" RES_C_1608X60 18.828,62.413 r0 top
R27 "49.9k" RES_C_1608X60 18.828,58.485 r0 top
R28 "DNP/150k" RES_C_1608X60 30.242,62.286 r180 top
R29 "4.7k" RES_C_1608X60 33.798,60.449 r180 top
R30 "11.3k" RES_C_1608X60 33.798,64.376 r0 top
R31 "10k" RES_C_1608X60 59.817,74.676 r0 top
R32 "1k" RES_C_1608X60 70.358,78.613 r270 top
R33 "22R" RES_C_1608X60 59.817,73.152 r180 top
R34 "22R" RES_C_1608X60 59.817,71.628 r180 top
R35 "22R" RES_C_1608X60 59.817,64.008 r0 top
R36 "22R" RES_C_1608X60 59.817,70.104 r180 top
R37 "22R" RES_C_1608X60 59.817,62.484 r0 top
R38 "22R" RES_C_1608X60 59.817,68.58 r180 top
R39 "22R" RES_C_1608X60 59.817,60.96 r0 top
R40 "22R" RES_C_1608X60 59.817,59.436 r0 top
R41 "0R" RES_C_1608X60 18.828,66.383 r0 top
R44 "22R" RES_C_1608X60 80.799,53.008 r270 top
R45 "22R" RES_C_1608X60 82.45,53.008 r270 top
R46 "22R" RES_C_1608X60 84.101,53.008 r270 top
R47 "22R" RES_C_1608X60 85.752,53.008 r270 top
R48 "10k" RES_C_1608X60 67.285,53.594 r0 top
R49 "4.7k" RES_C_1608X60 51.114,33.689 r90 top
R50 "4.7k" RES_C_1608X60 51.114,37.084 r270 top
R53 "10k" RES_C_1608X60 44.45,69.723 r90 top
R54 "4.7k" RES_C_1608X60 51.054,69.723 r270 top
R55 "4.7k" RES_C_1608X60 46.101,69.723 r270 top
R56 "10k" RES_C_1608X60 43.815,41.91 r180 top
R57 "120R" RES_C_1608X60 9.415,9.779 r90 top
R58 "10k" RES_C_1608X60 59.094,36.644 r90 top
R59 "120R" RES_C_1608X60 56.894,33.685 r90 top
R60 "10k" RES_C_1608X60 59.094,33.685 r270 top
R61 "Shunt 4 Pin" RES_C_1206_SHUNT 26.077,42.01 r270 top value=0.01R
R62 "Shunt 4 Pin" RES_C_1206_SHUNT 22.987,38.481 r270 top value=0.01R
R63 "10k" RES_C_1608X60 26.416,30.734 r180 top
R64 "Shunt 4 Pin" RES_C_1206_SHUNT 33.528,38.481 r270 top value=0.01R
R65 "10k" RES_C_1608X60 23.31,34.506 r270 top
R66 "Shunt 4 Pin" RES_C_1206_SHUNT 30.336,42.01 r270 top value=0.01R
R67 "10k" RES_C_1608X60 31.443,77.712 r180 top
R68 "10k" RES_C_1608X60 31.496,79.404 r180 top
R69 "10k" RES_C_1608X60 68.834,42.418 r0 top
R70 "22R" RES_C_1608X60 59.817,42.418 r0 top
R71 "10k" RES_C_1608X60 68.834,45.72 r180 top
R72 "22R" RES_C_1608X60 59.817,45.72 r180 top
R73 "22R" RES_C_1608X60 59.817,44.069 r0 top
R76 "10k" RES_C_1608X60 48.895,37.084 r270 top
R78 "1.5k" RES_C_1608X60 79.794,12.059 r90 top
R79 "5.1k" RES_C_1608X60 75.298,12.059 r90 top
R80 "1.5k" RES_C_1608X60 77.546,12.059 r90 top
R81 "5.1k" RES_C_1608X60 82.042,12.059 r90 top
R82 "1.5k" RES_C_1608X60 85.128,66.333 r180 top
R83 "1.5k" RES_C_1608X60 85.114,72.792 r180 top
R84 "1.5k" RES_C_1608X60 85.128,69.59 r180 top
R85 "22R" RES_C_1608X60 74.93,78.613 r270 top
R86 "22R" RES_C_1608X60 71.882,78.613 r90 top
R87 "22R" RES_C_1608X60 76.454,78.613 r90 top
R88 "22R" RES_C_1608X60 73.406,78.613 r90 top
SB1 "N/A" JUMPER_1608 11.19,9.779 r90 top
SB2 "N/A" JUMPER_1608 56.894,36.644 r270 top
U1 "TPS259470ARPWR" TPS259474 26.189,24.018 r90 top
U2 "TPS259470ARPWR" TPS259474 26.189,11.19 r90 top
U3 "LMR33630ADDA" HSOIC_8 43.753,23.221 r0 top
U4 "LMR33630ADDA" HSOIC_8 43.753,10.387 r0 top
U5 "TPS55287RYQR" VQFN_TPS 24.621,60.629 r0 top
U6 "ATMEGA128A-AU" TQFP-64 72.644,66.421 r0 top
U7 "MCP2515-SO" SOIC-20 46.609,60.706 r90 top
U8 "SN65HVD251DR" SOIC-8 43.802,45.847 r180 top
U9 "MAX485ESA+" SOIC127 64.548,34.853 r180 top
U10 "PAC1934T-I/JQ" QFN65 28.23,34.666 r90 top
U11 "TC1047AVNBTR" SOT-23 57.912,49.276 r270 top
U12 "SN65C3232PWR" TSSOP-16 24.612,80.391 r0 top
U13 "TPL5010QDDCTQ1" SOT-23-THN-6 64.382,43.937 r180 top
U14 "24LC04BT-E/SN" SOIC_127 43.626,35.474 r0 top
X2 "Crystal 2 Pins" CRYSTAL_NX2012SA 63.983,53.975 r180 top value=32.768kHz
X3 "8Mhz" XTAL_3225 49.742,51.031 r270 top
XC1 "FC5BQCCMC12.0-T1" AP7-00039 75.041,52.778 r180 top value=12.00MHz

## Footprints (in the part's own frame and the unit in brackets; to place one, negate y for a bottom-side part, rotate by r counter-clockwise, add the part's x,y. Pads: shape width x height; smd on the part's side, far side on the other; paste and mask are expansions set on the pad)
0532610471 [mm]
  rect 0.8x1.6 smd: 1(-1.875,1.45) 2(-0.625,1.45) 3(0.625,1.45) 4(1.875,1.45)
  rect 2.1x3 smd: S1(-4.425,-1.45) S2(4.425,-1.45)
  silkscreen extent -3.37,0.45 3.38,2.07, body extent -5.07,-3.2 5.07,2, height 3.4
532610671 [mm]
  rect 0.8x1.6 smd mask+0.076: 1(-3.125,1.45) 2(-1.875,1.45) 3(-0.625,1.45) 4(0.625,1.45) 5(1.875,1.45) 6(3.125,1.45)
  rect 2.1x3 smd mask+0.076: S1(-5.675,-1.45) S2(5.675,-1.45)
  silkscreen extent -6.32,0.35 6.32,1.65, body extent -6.32,-3.6 6.32,1.6, height 3.45
AP7-00039 [mm] "FOX FQ5032B"
  rect 1.6x1.3 smd: 1(-1.9,-1.15) 2(1.9,-1.15) 3(1.9,1.15) 4(-1.9,1.15)
  silkscreen extent -3,-2.1 3,2.1, body extent -2.5,-1.6 2.5,1.6, height 1
CAP_C_1608X80 [mm] "Chip Capacitor, 2-Leads, Body 1.60x0.80mm, IPC Medium Density"
  rrect50% 0.8x0.9 smd: 1(-0.8,0) 2(0.8,0)
  silkscreen extent -0.9,-0.7 0.9,0.7, body extent -0.87,-0.48 0.87,0.48, height 0.85
CAP_C_2012X110 [mm] "Chip Capacitor, 2-Leads, Body 2.00x1.25mm, IPC High Density"
  rrect41% 1.2x1.3 smd: 1(-0.9,0) 2(0.9,0)
  silkscreen extent -1.1,-0.9 1.1,0.9, body extent -1.1,-0.72 1.1,0.72, height 1.1
CAP_C_3225X80 [mm] "Chip Capacitor, 2-Leads, Body 3.20x2.50mm, IPC Medium Density"
  rrect38% 1.3x2.7 smd: 1(-1.4,0) 2(1.4,0)
  silkscreen extent -0.6,-1.35 0.6,1.35, body extent -1.7,-1.35 1.7,1.35, height 0.75
CRYSTAL_NX2012SA [mil] "Crystal NDK NX2012SA"
  rect 40x50 smd paste-1: 1(-30,0) 2(30,0)
  silkscreen extent -64,-39 64,39, body extent -40,-20 40,20, height 21
DO-214AA_SMB [mm] "Molded Diode, 2-Leads, Body 5.40x3.63mm, IPC Medium Density"
  rrect22% 2.4x2.2 smd: 1(-2.1,0) 2(2.1,0)
  silkscreen extent -3.5,-2 2.8,2, body extent -2.7,-1.81 2.7,1.81, height 2.44
DO-214AC_SMA [mm] "Molded Diode, 2-Leads, Body 5.20x2.61mm, IPC Medium Density"
  rrect30% 2.55x1.65 smd: 1(-2.05,0) 2(2.05,0)
  silkscreen extent -3.6,-1.5 2.8,1.5, body extent -2.6,-1.3 2.6,1.3, height 2.4
ESQ-126-14-G-D [mm]
  rect 1.53x1.53 hole 0.9: 01(1.681,1.227)
  round 1.53 hole 0.9: 02(1.681,3.767) 03(4.221,1.227) 04(4.221,3.767) 05(6.761,1.227) 06(6.761,3.767) 07(9.301,1.227) 08(9.301,3.767) 09(11.841,1.227) 10(11.841,3.767) 11(14.381,1.227) 12(14.381,3.767) 13(16.921,1.227) 14(16.921,3.767) 15(19.461,1.227) 16(19.461,3.767) 17(22.001,1.227) 18(22.001,3.767) 19(24.541,1.227) 20(24.541,3.767) 21(27.081,1.227) 22(27.081,3.767) 23(29.621,1.227) 24(29.621,3.767) 25(32.161,1.227) 26(32.161,3.767) 27(34.701,1.227) 28(34.701,3.767) 29(37.241,1.227) 30(37.241,3.767) 31(39.781,1.227) 32(39.781,3.767) 33(42.321,1.227) 34(42.321,3.767) 35(44.861,1.227) 36(44.861,3.767) 37(47.401,1.227) 38(47.401,3.767) 39(49.941,1.227) 40(49.941,3.767) 41(52.481,1.227) 42(52.481,3.767) 43(55.021,1.227) 44(55.021,3.767) 45(57.561,1.227) 46(57.561,3.767) 47(60.101,1.227) 48(60.101,3.767) 49(62.641,1.227) 50(62.641,3.767) 51(65.181,1.227) 52(65.181,3.767)
  silkscreen extent -0.59,0.02 66.71,4.97, body extent 0.16,-0.04 66.71,5.04, height 11.1
Header_254P_2x1 [mm]
  rect 1.6x1.6 hole 1.1: 1(-1.27,0)
  round 1.6 hole 1.1: 2(1.27,0)
  silkscreen extent -2.54,-1.27 2.54,1.27
Header_254P_8x1 [mm]
  rect 1.6x1.6 hole 1.1: 1(-8.89,0)
  round 1.6 hole 1.1: 2(-6.35,0) 3(-3.81,0) 4(-1.27,0) 5(1.27,0) 6(3.81,0) 7(6.35,0) 8(8.89,0)
  silkscreen extent -10.16,-1.27 10.16,1.27
HEX-M3#1 [mm]
  round 6 / inner round 4.4 / far side round 6 hole 3.18: 1(-0.039,0.217)
HEX-M3#2 [mm]
  round 6 / inner round 4.4 / far side round 6 hole 3.18: 1(1.543,0.682)
HEX-M3#3 [mm]
  round 6 / inner round 4.4 / far side round 6 hole 3.18: 1(-0.025,0)
HSOIC_8 [mm]
  rrect5% 1.55x0.6 smd mask+0: 1(-2.7,1.905) 2(-2.7,0.635) 3(-2.7,-0.635) 4(-2.7,-1.905) 5(2.7,-1.905) 6(2.7,-0.635) 7(2.7,0.635) 8(2.7,1.905)
  rect 2.95x4.9 smd paste-3 mask+0: 9(0,0)
  silkscreen extent -4.17,-2.73 2,2.69, body extent -3,-2.45 3,2.45, height 1.7
"INDUCTOR 6363" [mil]
  rect 200x80 smd: 1(1.02,-109.54) 2(-1.02,109.54)
  silkscreen extent -150,-160 152,160, body extent -128,-137 135,138, height 89
"INDUCTOR SMD 6X5.7X5" [mil]
  rect 80x200 smd: 1(-90,0) 2(100,0)
  silkscreen extent -150,-120 160,120, body extent -112,-108 112,108, height 201
JUMPER_1608 [mil]
  round 1 smd paste-99999: 1(30.51,0) 2(-30,0)
  L1_TOP region: 38.88,-18.7 13.56,-18.7 -5,0 13.56,18.7 38.88,18.7 42.08,18.06 44.79,16.25 46.61,13.54 47.24,10.33 47.24,10.33 47.24,-10.33 46.61,-13.54 44.79,-16.25 42.08,-18.06 38.88,-18.7
  L1_TOP region: -14.86,-0.09 3.75,-18.7 -38.37,-18.7 -41.57,-18.06 -44.28,-16.25 -46.1,-13.54 -46.73,-10.33 -46.73,-10.33 -46.73,10.33 -46.1,13.54 -44.28,16.25 -41.57,18.06 -38.37,18.7 -38.37,18.7 3.93,18.7
  silkscreen extent -40,-27 41,27
L-SMD-0603 [mm]
  rrect50% 0.8x0.9 smd: 1(-0.8,0) 2(0.8,0)
  silkscreen extent -1.4,-0.72 1.4,0.72, body extent -0.8,-0.4 0.8,0.4, height 0.81
LED_0603 [mm]
  rrect50% 0.85x0.95 smd: 1(-0.775,0) 2(0.775,0)
  silkscreen extent -1.4,-0.7 0.9,0.7, body extent -0.8,-0.4 0.8,0.4, height 0.7
NETTIE_SMD [mm]
  rect 1x1 smd mask-10: 1(-1,0) 2(1,0)
  L1_TOP region: -0.75,-0.25 0.75,-0.25 0.75,0.25 -0.75,0.25
QFN65 [mm]
  rrect75% 0.86x0.32 smd: 1(-1.93,1.011) 2(-1.93,0.361) 3(-1.93,-0.289) 4(-1.93,-0.939) 9(1.94,-0.939) 10(1.94,-0.289) 11(1.94,0.361) 12(1.94,1.011)
  rrect75% 0.32x0.86 smd: 5(-0.97,-1.899) 6(-0.32,-1.899) 7(0.33,-1.899) 8(0.98,-1.899) 13(0.98,1.971) 14(0.33,1.971) 15(-0.32,1.971) 16(-0.97,1.971)
  rect 2.6x2.6 smd paste-2: 17(0.005,0.036)
  silkscreen extent -2.53,-2.01 2.06,2.09, body extent -1.99,-1.96 2.01,2.04, height 0.55
RES_C_1206_SHUNT [mm] "Chip Resistor, 2-Leads, Body 3.2x1.6mm, IPC Medium Density"
  rect 1x0.5 smd mask+0.1: 1(-1.5,0.6) 1(-1.5,-0.6) 2(1.5,0.6) 2(1.5,-0.6)
  rect 1x0.35 smd mask+0.1: 3(-1.5,0) 4(1.5,0)
  silkscreen extent -0.6,-0.77 0.6,0.78, body extent -1.6,-0.8 1.6,0.8, height 1
RES_C_1608X60 [mm] "Chip Resistor, 2-Leads, Body 1.63x0.83mm, IPC High Density"
  rrect50% 0.85x0.95 smd: 1(-0.8,0) 2(0.8,0)
  silkscreen extent -0.9,-0.7 0.9,0.7, body extent -0.87,-0.48 0.87,0.48, height 0.6
RES_C_3216X70 [mm] "Chip Resistor, 2-Leads, Body 3.20x1.60mm, IPC Medium Density"
  rrect39% 1.25x1.75 smd: 1(-1.4,0) 2(1.4,0)
  silkscreen extent -0.6,-0.9 0.6,0.9, body extent -1.68,-0.87 1.68,0.87, height 0.71
SOIC127 [mm]
  rrect25% 1.97x0.59 smd paste+0 mask+0.102: 1(-2.419,1.639) 2(-2.419,0.369) 3(-2.419,-0.901) 4(-2.419,-2.171) 5(2.531,-2.171) 6(2.531,-0.901) 7(2.531,0.369) 8(2.531,1.639)
  silkscreen extent -4.49,-2.79 2.06,2.33, body extent -2.94,-2.76 3.06,2.22, height 1.68
SOIC-8 [mm] "SOIC, 8-Leads, Body 5.0x4.0mm (max), Pitch 1.27mm, IPC Medium Density"
  oval 2.2x0.6 smd: 1(-2.4,1.905) 2(-2.4,0.635) 3(-2.4,-0.635) 4(-2.4,-1.905) 5(2.4,-1.905) 6(2.4,-0.635) 7(2.4,0.635) 8(2.4,1.905)
  silkscreen extent -2.53,-2.5 0.9,2.88, body extent -3,-2.49 3,2.41, height 1.75
SOIC-20 [mm] "SOIC, 20-Leads, Body 12.8x7.5mm (max), Pitch 1.27mm, IPC Medium Density"
  oval 2.15x0.6 smd: 1(-4.65,5.715) 2(-4.65,4.445) 3(-4.65,3.175) 4(-4.65,1.905) 5(-4.65,0.635) 6(-4.65,-0.635) 7(-4.65,-1.905) 8(-4.65,-3.175) 9(-4.65,-4.445) 10(-4.65,-5.715) 11(4.65,-5.715) 12(4.65,-4.445) 13(4.65,-3.175) 14(4.65,-1.905) 15(4.65,-0.635) 16(4.65,0.635) 17(4.65,1.905) 18(4.65,3.175) 19(4.65,4.445) 20(4.65,5.715)
  silkscreen extent -4.77,-6.4 3.18,6.69, body extent -5.08,-6.5 5.26,6.5, height 2.8
SOIC_127 [mil]
  rect 78x22 smd paste+0 mask+4.02: 1(-87.56,79.73) 2(-87.56,29.73) 3(-87.56,-20.27) 4(-87.56,-70.27) 5(98.44,-70.27) 6(98.44,-20.27) 7(98.44,29.73) 8(98.44,79.73)
  silkscreen extent -41,-91 51,101, body extent -113,-92 124,101, height 69
SOT-23 [mm] "SOT23, 3-Leads, Body 3.0x2.5mm (max), Pitch 0.95mm, IPC Medium Density"
  rect 1x0.6 smd: 1(-1,0.95) 2(-1,-0.95) 3(1,0)
  silkscreen extent 0.2,-1.5 0.7,1.5, body extent -1.28,-1.46 1.27,1.46, height 0.95
SOT-23-THN-6 [mm]
  rrect25% 1.45x0.59 smd: 1(-1.213,0.84) 2(-1.213,-0.11) 3(-1.213,-1.06) 4(1.097,-1.06) 5(1.097,-0.11) 6(1.097,0.84)
  silkscreen extent -2.56,-1.67 0.74,1.46, body extent -1.46,-1.56 1.34,1.34, height 1.1
TPS259474 [mm]
  rrect37% 0.6x0.3 smd paste-1 mask+0: 1(-0.919,0.664) 4(-0.919,-0.736) 7(0.881,-0.736) 10(0.881,0.664)
  rrect37% 0.6x0.25 smd mask+0: 2(-0.919,0.189) 3(-0.919,-0.261) 8(0.881,-0.261) 9(0.881,0.189)
  rrect37% 0.3x2.4 smd paste-2 mask+0: 5(-0.269,-0.036) 6(0.231,-0.036)
  L1_TOP region: -0.661,-0.587 -0.659,-0.587 -0.656,-0.588 -0.654,-0.588 -0.651,-0.589 -0.649,-0.59 -0.646,-0.591 -0.644,-0.593 -0.642,-0.594 -0.64,-0.596 -0.638,-0.597 -0.636,-0.599 -0.634,-0.601 -0.632,-0.603 -0.63,-0.605 -0.629,-0.607 -0.627,-0.609 -0.626,-0.611 -0.624,-0.613 -0.623,-0.616 -0.622,-0.618 -0.621,-0.621 -0.621,-0.623 -0.62,-0.626 -0.62,-0.628 -0.619,-0.631 -0.619,-0.633 -0.619,-0.636 -0.619,-1.186 -0.619,-1.189 -0.619,-1.191 -0.62,-1.194 -0.62,-1.196 -0.621,-1.199 -0.621,-1.201 -0.622,-1.204 -0.623,-1.206 -0.624,-1.209 -0.626,-1.211 -0.627,-1.213 -0.629,-1.215 -0.63,-1.217 -0.632,-1.219 -0.634,-1.221 -0.636,-1.223 -0.638,-1.225 -0.64,-1.226 -0.642,-1.228 -0.644,-1.229 -0.646,-1.231 -0.649,-1.232 -0.651,-1.233 -0.654,-1.234 -0.656,-1.234 -0.659,-1.235 -0.661,-1.235 -0.664,-1.236 -0.824,-1.236 -0.827,-1.235 -0.829,-1.235 -0.832,-1.234 -0.834,-1.234 -0.837,-1.233 -0.839,-1.232 -0.842,-1.231 -0.844,-1.229 -0.846,-1.228 -0.848,-1.226 -0.85,-1.225 -0.852,-1.223 -0.854,-1.221 -0.856,-1.219 -0.858,-1.217 -0.859,-1.215 -0.861,-1.213 -0.862,-1.211 -0.864,-1.209 -0.865,-1.206 -0.866,-1.204 -0.867,-1.201 -0.867,-1.199 -0.868,-1.196 -0.868,-1.194 -0.869,-1.191 -0.869,-1.189 -0.869,-1.186 -0.869,-0.886 -1.174,-0.886 -1.177,-0.885 -1.179,-0.885 -1.182,-0.884 -1.184,-0.884 -1.187,-0.883 -1.189,-0.882 -1.192,-0.881 -1.194,-0.879 -1.196,-0.878 -1.198,-0.876 -1.2,-0.875 -1.202,-0.873 -1.204,-0.871 -1.206,-0.869 -1.208,-0.867 -1.209,-0.865 -1.211,-0.863 -1.212,-0.861 -1.214,-0.859 -1.215,-0.856 -1.216,-0.854 -1.217,-0.851 -1.217,-0.849 -1.218,-0.846 -1.218,-0.844 -1.219,-0.841 -1.219,-0.839 -1.219,-0.836 -1.219,-0.636 -1.219,-0.633 -1.219,-0.631 -1.218,-0.628 -1.218,-0.626 -1.217,-0.623 -1.217,-0.621 -1.216,-0.618 -1.215,-0.616 -1.214,-0.613 -1.212,-0.611 -1.211,-0.609 -1.209,-0.607 -1.208,-0.605 -1.206,-0.603 -1.204,-0.601 -1.202,-0.599 -1.2,-0.597 -1.198,-0.596 -1.196,-0.594 -1.194,-0.593 -1.192,-0.591 -1.189,-0.59 -1.187,-0.589 -1.184,-0.588 -1.182,-0.588 -1.179,-0.587 -1.177,-0.587 -1.174,-0.586 -0.664,-0.586
  L1_TOP region: -0.661,1.163 -0.659,1.163 -0.656,1.162 -0.654,1.162 -0.651,1.161 -0.649,1.16 -0.646,1.159 -0.644,1.157 -0.642,1.156 -0.64,1.154 -0.638,1.153 -0.636,1.151 -0.634,1.149 -0.632,1.147 -0.63,1.145 -0.629,1.143 -0.627,1.141 -0.626,1.139 -0.624,1.137 -0.623,1.134 -0.622,1.132 -0.621,1.129 -0.621,1.127 -0.62,1.124 -0.62,1.122 -0.619,1.119 -0.619,1.117 -0.619,1.114 -0.619,0.564 -0.619,0.561 -0.619,0.559 -0.62,0.556 -0.62,0.554 -0.621,0.551 -0.621,0.549 -0.622,0.546 -0.623,0.544 -0.624,0.541 -0.626,0.539 -0.627,0.537 -0.629,0.535 -0.63,0.533 -0.632,0.531 -0.634,0.529 -0.636,0.527 -0.638,0.525 -0.64,0.524 -0.642,0.522 -0.644,0.521 -0.646,0.519 -0.649,0.518 -0.651,0.517 -0.654,0.516 -0.656,0.516 -0.659,0.515 -0.661,0.515 -0.664,0.514 -1.174,0.514 -1.177,0.515 -1.179,0.515 -1.182,0.516 -1.184,0.516 -1.187,0.517 -1.189,0.518 -1.192,0.519 -1.194,0.521 -1.196,0.522 -1.198,0.524 -1.2,0.525 -1.202,0.527 -1.204,0.529 -1.206,0.531 -1.208,0.533 -1.209,0.535 -1.211,0.537 -1.212,0.539 -1.214,0.541 -1.215,0.544 -1.216,0.546 -1.217,0.549 -1.217,0.551 -1.218,0.554 -1.218,0.556 -1.219,0.559 -1.219,0.561 -1.219,0.564 -1.219,0.764 -1.219,0.767 -1.219,0.769 -1.218,0.772 -1.218,0.774 -1.217,0.777 -1.217,0.779 -1.216,0.782 -1.215,0.784 -1.214,0.787 -1.212,0.789 -1.211,0.791 -1.209,0.793 -1.208,0.795 -1.206,0.797 -1.204,0.799 -1.202,0.801 -1.2,0.803 -1.198,0.804 -1.196,0.806 -1.194,0.807 -1.192,0.809 -1.189,0.81 -1.187,0.811 -1.184,0.812 -1.182,0.812 -1.179,0.813 -1.177,0.813 -1.174,0.814 -0.869,0.814 -0.869,1.114 -0.869,1.117 -0.869,1.119 -0.868,1.122 -0.868,1.124 -0.867,1.127 -0.867,1.129 -0.866,1.132 -0.865,1.134 -0.864,1.137 -0.862,1.139 -0.861,1.141 -0.859,1.143 -0.858,1.145 -0.856,1.147 -0.854,1.149 -0.852,1.151 -0.85,1.153 -0.848,1.154 -0.846,1.156 -0.844,1.157 -0.842,1.159 -0.839,1.16 -0.837,1.161 -0.834,1.162 -0.832,1.162 -0.829,1.163 -0.827,1.163 -0.824,1.164 -0.664,1.164
  L1_TOP region: 1.139,-0.587 1.141,-0.587 1.144,-0.588 1.146,-0.588 1.149,-0.589 1.151,-0.59 1.154,-0.591 1.156,-0.593 1.158,-0.594 1.16,-0.596 1.162,-0.597 1.164,-0.599 1.166,-0.601 1.168,-0.603 1.17,-0.605 1.171,-0.607 1.173,-0.609 1.174,-0.611 1.176,-0.613 1.177,-0.616 1.178,-0.618 1.179,-0.621 1.179,-0.623 1.18,-0.626 1.18,-0.628 1.181,-0.631 1.181,-0.633 1.181,-0.636 1.181,-0.836 1.181,-0.839 1.181,-0.841 1.18,-0.844 1.18,-0.846 1.179,-0.849 1.179,-0.851 1.178,-0.854 1.177,-0.856 1.176,-0.859 1.174,-0.861 1.173,-0.863 1.171,-0.865 1.17,-0.867 1.168,-0.869 1.166,-0.871 1.164,-0.873 1.162,-0.875 1.16,-0.876 1.158,-0.878 1.156,-0.879 1.154,-0.881 1.151,-0.882 1.149,-0.883 1.146,-0.884 1.144,-0.884 1.141,-0.885 1.139,-0.885 1.136,-0.886 0.831,-0.886 0.831,-1.186 0.831,-1.189 0.831,-1.191 0.83,-1.194 0.83,-1.196 0.829,-1.199 0.829,-1.201 0.828,-1.204 0.827,-1.206 0.826,-1.209 0.824,-1.211 0.823,-1.213 0.821,-1.215 0.82,-1.217 0.818,-1.219 0.816,-1.221 0.814,-1.223 0.812,-1.225 0.81,-1.226 0.808,-1.228 0.806,-1.229 0.804,-1.231 0.801,-1.232 0.799,-1.233 0.796,-1.234 0.794,-1.234 0.791,-1.235 0.789,-1.235 0.786,-1.236 0.626,-1.236 0.623,-1.235 0.621,-1.235 0.618,-1.234 0.616,-1.234 0.613,-1.233 0.611,-1.232 0.608,-1.231 0.606,-1.229 0.604,-1.228 0.602,-1.226 0.6,-1.225 0.598,-1.223 0.596,-1.221 0.594,-1.219 0.592,-1.217 0.591,-1.215 0.589,-1.213 0.588,-1.211 0.586,-1.209 0.585,-1.206 0.584,-1.204 0.583,-1.201 0.583,-1.199 0.582,-1.196 0.582,-1.194 0.581,-1.191 0.581,-1.189 0.581,-1.186 0.581,-0.636 0.581,-0.633 0.581,-0.631 0.582,-0.628 0.582,-0.626 0.583,-0.623 0.583,-0.621 0.584,-0.618 0.585,-0.616 0.586,-0.613 0.588,-0.611 0.589,-0.609 0.591,-0.607 0.592,-0.605 0.594,-0.603 0.596,-0.601 0.598,-0.599 0.6,-0.597 0.602,-0.596 0.604,-0.594 0.606,-0.593 0.608,-0.591 0.611,-0.59 0.613,-0.589 0.616,-0.588 0.618,-0.588 0.621,-0.587 0.623,-0.587 0.626,-0.586 1.136,-0.586
  L1_TOP region: 0.789,1.163 0.791,1.163 0.794,1.162 0.796,1.162 0.799,1.161 0.801,1.16 0.804,1.159 0.806,1.157 0.808,1.156 0.81,1.154 0.812,1.153 0.814,1.151 0.816,1.149 0.818,1.147 0.82,1.145 0.821,1.143 0.823,1.141 0.824,1.139 0.826,1.137 0.827,1.134 0.828,1.132 0.829,1.129 0.829,1.127 0.83,1.124 0.83,1.122 0.831,1.119 0.831,1.117 0.831,1.114 0.831,0.814 1.136,0.814 1.139,0.813 1.141,0.813 1.144,0.812 1.146,0.812 1.149,0.811 1.151,0.81 1.154,0.809 1.156,0.807 1.158,0.806 1.16,0.804 1.162,0.803 1.164,0.801 1.166,0.799 1.168,0.797 1.17,0.795 1.171,0.793 1.173,0.791 1.174,0.789 1.176,0.787 1.177,0.784 1.178,0.782 1.179,0.779 1.179,0.777 1.18,0.774 1.18,0.772 1.181,0.769 1.181,0.767 1.181,0.764 1.181,0.564 1.181,0.561 1.181,0.559 1.18,0.556 1.18,0.554 1.179,0.551 1.179,0.549 1.178,0.546 1.177,0.544 1.176,0.541 1.174,0.539 1.173,0.537 1.171,0.535 1.17,0.533 1.168,0.531 1.166,0.529 1.164,0.527 1.162,0.525 1.16,0.524 1.158,0.522 1.156,0.521 1.154,0.519 1.151,0.518 1.149,0.517 1.146,0.516 1.144,0.516 1.141,0.515 1.139,0.515 1.136,0.514 0.626,0.514 0.623,0.515 0.621,0.515 0.618,0.516 0.616,0.516 0.613,0.517 0.611,0.518 0.608,0.519 0.606,0.521 0.604,0.522 0.602,0.524 0.6,0.525 0.598,0.527 0.596,0.529 0.594,0.531 0.592,0.533 0.591,0.535 0.589,0.537 0.588,0.539 0.586,0.541 0.585,0.544 0.584,0.546 0.583,0.549 0.583,0.551 0.582,0.554 0.582,0.556 0.581,0.559 0.581,0.561 0.581,0.564 0.581,1.114 0.581,1.117 0.581,1.119 0.582,1.122 0.582,1.124 0.583,1.127 0.583,1.129 0.584,1.132 0.585,1.134 0.586,1.137 0.588,1.139 0.589,1.141 0.591,1.143 0.592,1.145 0.594,1.147 0.596,1.149 0.598,1.151 0.6,1.153 0.602,1.154 0.604,1.156 0.606,1.157 0.608,1.159 0.611,1.16 0.613,1.161 0.616,1.162 0.618,1.162 0.621,1.163 0.623,1.163 0.626,1.164 0.786,1.164
  silkscreen extent -1.51,1.07 -1.31,1.27, body extent -1.02,-1.04 0.98,0.96, height 1
TQFP-64 [mil]
  rect 58x20 smd: 1(-290.63,213.78) 2(-290.63,182.78) 3(-290.63,150.78) 4(-290.63,119.78) 5(-290.63,87.78) 6(-290.63,56.78) 7(-290.63,24.78) 8(-290.63,-6.22) 9(-290.63,-38.22) 10(-290.63,-69.22) 11(-290.63,-101.22) 12(-290.63,-132.22) 13(-290.63,-164.22) 14(-290.63,-195.22) 15(-290.63,-227.22) 16(-290.63,-258.22) 33(309.37,-258.22) 34(309.37,-227.22) 35(309.37,-195.22) 36(309.37,-164.22) 37(309.37,-132.22) 38(309.37,-101.22) 39(309.37,-69.22) 40(309.37,-38.22) 41(309.37,-6.22) 42(309.37,24.78) 43(309.37,56.78) 44(309.37,87.78) 45(309.37,119.78) 46(309.37,150.78) 47(309.37,182.78) 48(309.37,213.78)
  rect 20x58 smd: 17(-226.63,-322.22) 18(-195.63,-322.22) 19(-163.63,-322.22) 20(-132.63,-322.22) 21(-100.63,-322.22) 22(-69.63,-322.22) 23(-37.63,-322.22) 24(-6.63,-322.22) 25(25.37,-322.22) 26(56.37,-322.22) 27(88.37,-322.22) 28(119.37,-322.22) 29(151.37,-322.22) 30(182.37,-322.22) 31(214.37,-322.22) 32(245.37,-322.22) 49(245.37,277.78) 50(214.37,277.78) 51(182.37,277.78) 52(151.37,277.78) 53(119.37,277.78) 54(88.37,277.78) 55(56.37,277.78) 56(25.37,277.78) 57(-6.63,277.78) 58(-37.63,277.78) 59(-69.63,277.78) 60(-100.63,277.78) 61(-132.63,277.78) 62(-163.63,277.78) 63(-195.63,277.78) 64(-226.63,277.78)
  silkscreen extent -267,-298 285,254, body extent -306,-337 324,293, height 47
TSSOP-16 [mm]
  rrect25% 1.57x0.41 smd: 1(-2.87,2.275) 2(-2.87,1.625) 3(-2.87,0.975) 4(-2.87,0.325) 5(-2.87,-0.325) 6(-2.87,-0.975) 7(-2.87,-1.625) 8(-2.87,-2.275) 9(2.87,-2.275) 10(2.87,-1.625) 11(2.87,-0.975) 12(2.87,-0.325) 13(2.87,0.325) 14(2.87,0.975) 15(2.87,1.625) 16(2.87,2.275)
  silkscreen extent -4.29,-2.5 1.77,2.5, body extent -3.2,-2.5 3.2,2.5, height 1.2
VQFN_TPS [mm]
  rrect40% 0.6x0.25 smd paste-1 mask+0: 1(-2.434,0.791) 2(-2.434,0.291) 3(-2.434,-0.209) 4(-2.434,-0.709) 14(2.366,-0.709) 15(2.366,-0.209) 16(2.366,0.291) 17(2.366,0.791)
  rrect40% 0.25x0.65 smd paste-1 mask+0: 5(-2.074,-1.334) 13(2.006,-1.334) 18(2.006,1.416) 21(-2.074,1.416)
  rrect40% 0.25x0.6 smd paste-1 mask+0: 6(-1.574,-1.359) 12(1.506,-1.359) 19(1.506,1.441) 20(-1.574,1.441)
  rrect40% 0.25x3.4 smd paste-3 mask+0: 7(-1.074,0.041) 8(-0.574,0.041) 10(0.506,0.041) 11(1.006,0.041)
  rect 0.25x1.2 smd paste-2 mask+0: 9(-0.034,0.041)
  L1_TOP region: 0.049,1.74 0.051,1.74 0.054,1.739 0.056,1.739 0.059,1.738 0.061,1.737 0.064,1.736 0.066,1.734 0.068,1.733 0.07,1.731 0.072,1.73 0.074,1.728 0.076,1.726 0.078,1.724 0.08,1.722 0.081,1.72 0.083,1.718 0.084,1.716 0.086,1.714 0.087,1.711 0.088,1.709 0.089,1.706 0.089,1.704 0.09,1.701 0.09,1.699 0.091,1.696 0.091,1.694 0.091,1.691 0.091,1.216 0.131,1.216 0.131,-1.134 0.091,-1.134 0.091,-1.609 0.091,-1.612 0.091,-1.614 0.09,-1.617 0.09,-1.619 0.089,-1.622 0.089,-1.624 0.088,-1.627 0.087,-1.629 0.086,-1.632 0.084,-1.634 0.083,-1.636 0.081,-1.638 0.08,-1.64 0.078,-1.642 0.076,-1.644 0.074,-1.646 0.072,-1.648 0.07,-1.649 0.068,-1.651 0.066,-1.652 0.064,-1.654 0.061,-1.655 0.059,-1.656 0.056,-1.657 0.054,-1.657 0.051,-1.658 0.049,-1.658 0.046,-1.659 -0.114,-1.659 -0.117,-1.658 -0.119,-1.658 -0.122,-1.657 -0.124,-1.657 -0.127,-1.656 -0.129,-1.655 -0.132,-1.654 -0.134,-1.652 -0.136,-1.651 -0.138,-1.649 -0.14,-1.648 -0.142,-1.646 -0.144,-1.644 -0.146,-1.642 -0.148,-1.64 -0.149,-1.638 -0.151,-1.636 -0.152,-1.634 -0.154,-1.632 -0.155,-1.629 -0.156,-1.627 -0.157,-1.624 -0.157,-1.622 -0.158,-1.619 -0.158,-1.617 -0.159,-1.614 -0.159,-1.612 -0.159,-1.609 -0.159,-1.134 -0.199,-1.134 -0.199,1.216 -0.159,1.216 -0.159,1.691 -0.159,1.694 -0.159,1.696 -0.158,1.699 -0.158,1.701 -0.157,1.704 -0.157,1.706 -0.156,1.709 -0.155,1.711 -0.154,1.714 -0.152,1.716 -0.151,1.718 -0.149,1.72 -0.148,1.722 -0.146,1.724 -0.144,1.726 -0.142,1.728 -0.14,1.73 -0.138,1.731 -0.136,1.733 -0.134,1.734 -0.132,1.736 -0.129,1.737 -0.127,1.738 -0.124,1.739 -0.122,1.739 -0.119,1.74 -0.117,1.74 -0.114,1.741 0.046,1.741
  silkscreen extent -3.44,-1.46 2.47,1.54, body extent -2.53,-1.46 2.47,1.54, height 1
XTAL_3225 [mm]
  rrect10% 1.3x1.1 smd: 1(-1.15,-0.95) 2(1.15,-0.95) 3(1.15,0.95) 4(-1.15,0.95)
  silkscreen extent -2.23,-1.89 -1,-1, body extent -1.6,-1.28 1.6,1.22, height 0.61